# Altium PCB Player.PcbDoc (part 1 of 6)
Units mil, origin at the board's own origin, x right, y up, seen from the top; angles counter-clockwise.
Board outline 2992.13 x 3937.01 mil, 6 copper layers (Top Layer, Mid-Layer 1, Mid-Layer 2, Mid-Layer 3, Mid-Layer 4, Bottom Layer), stack 60.567 mil thick; 284 components, 323 nets, 1590 pads, 1045 vias.
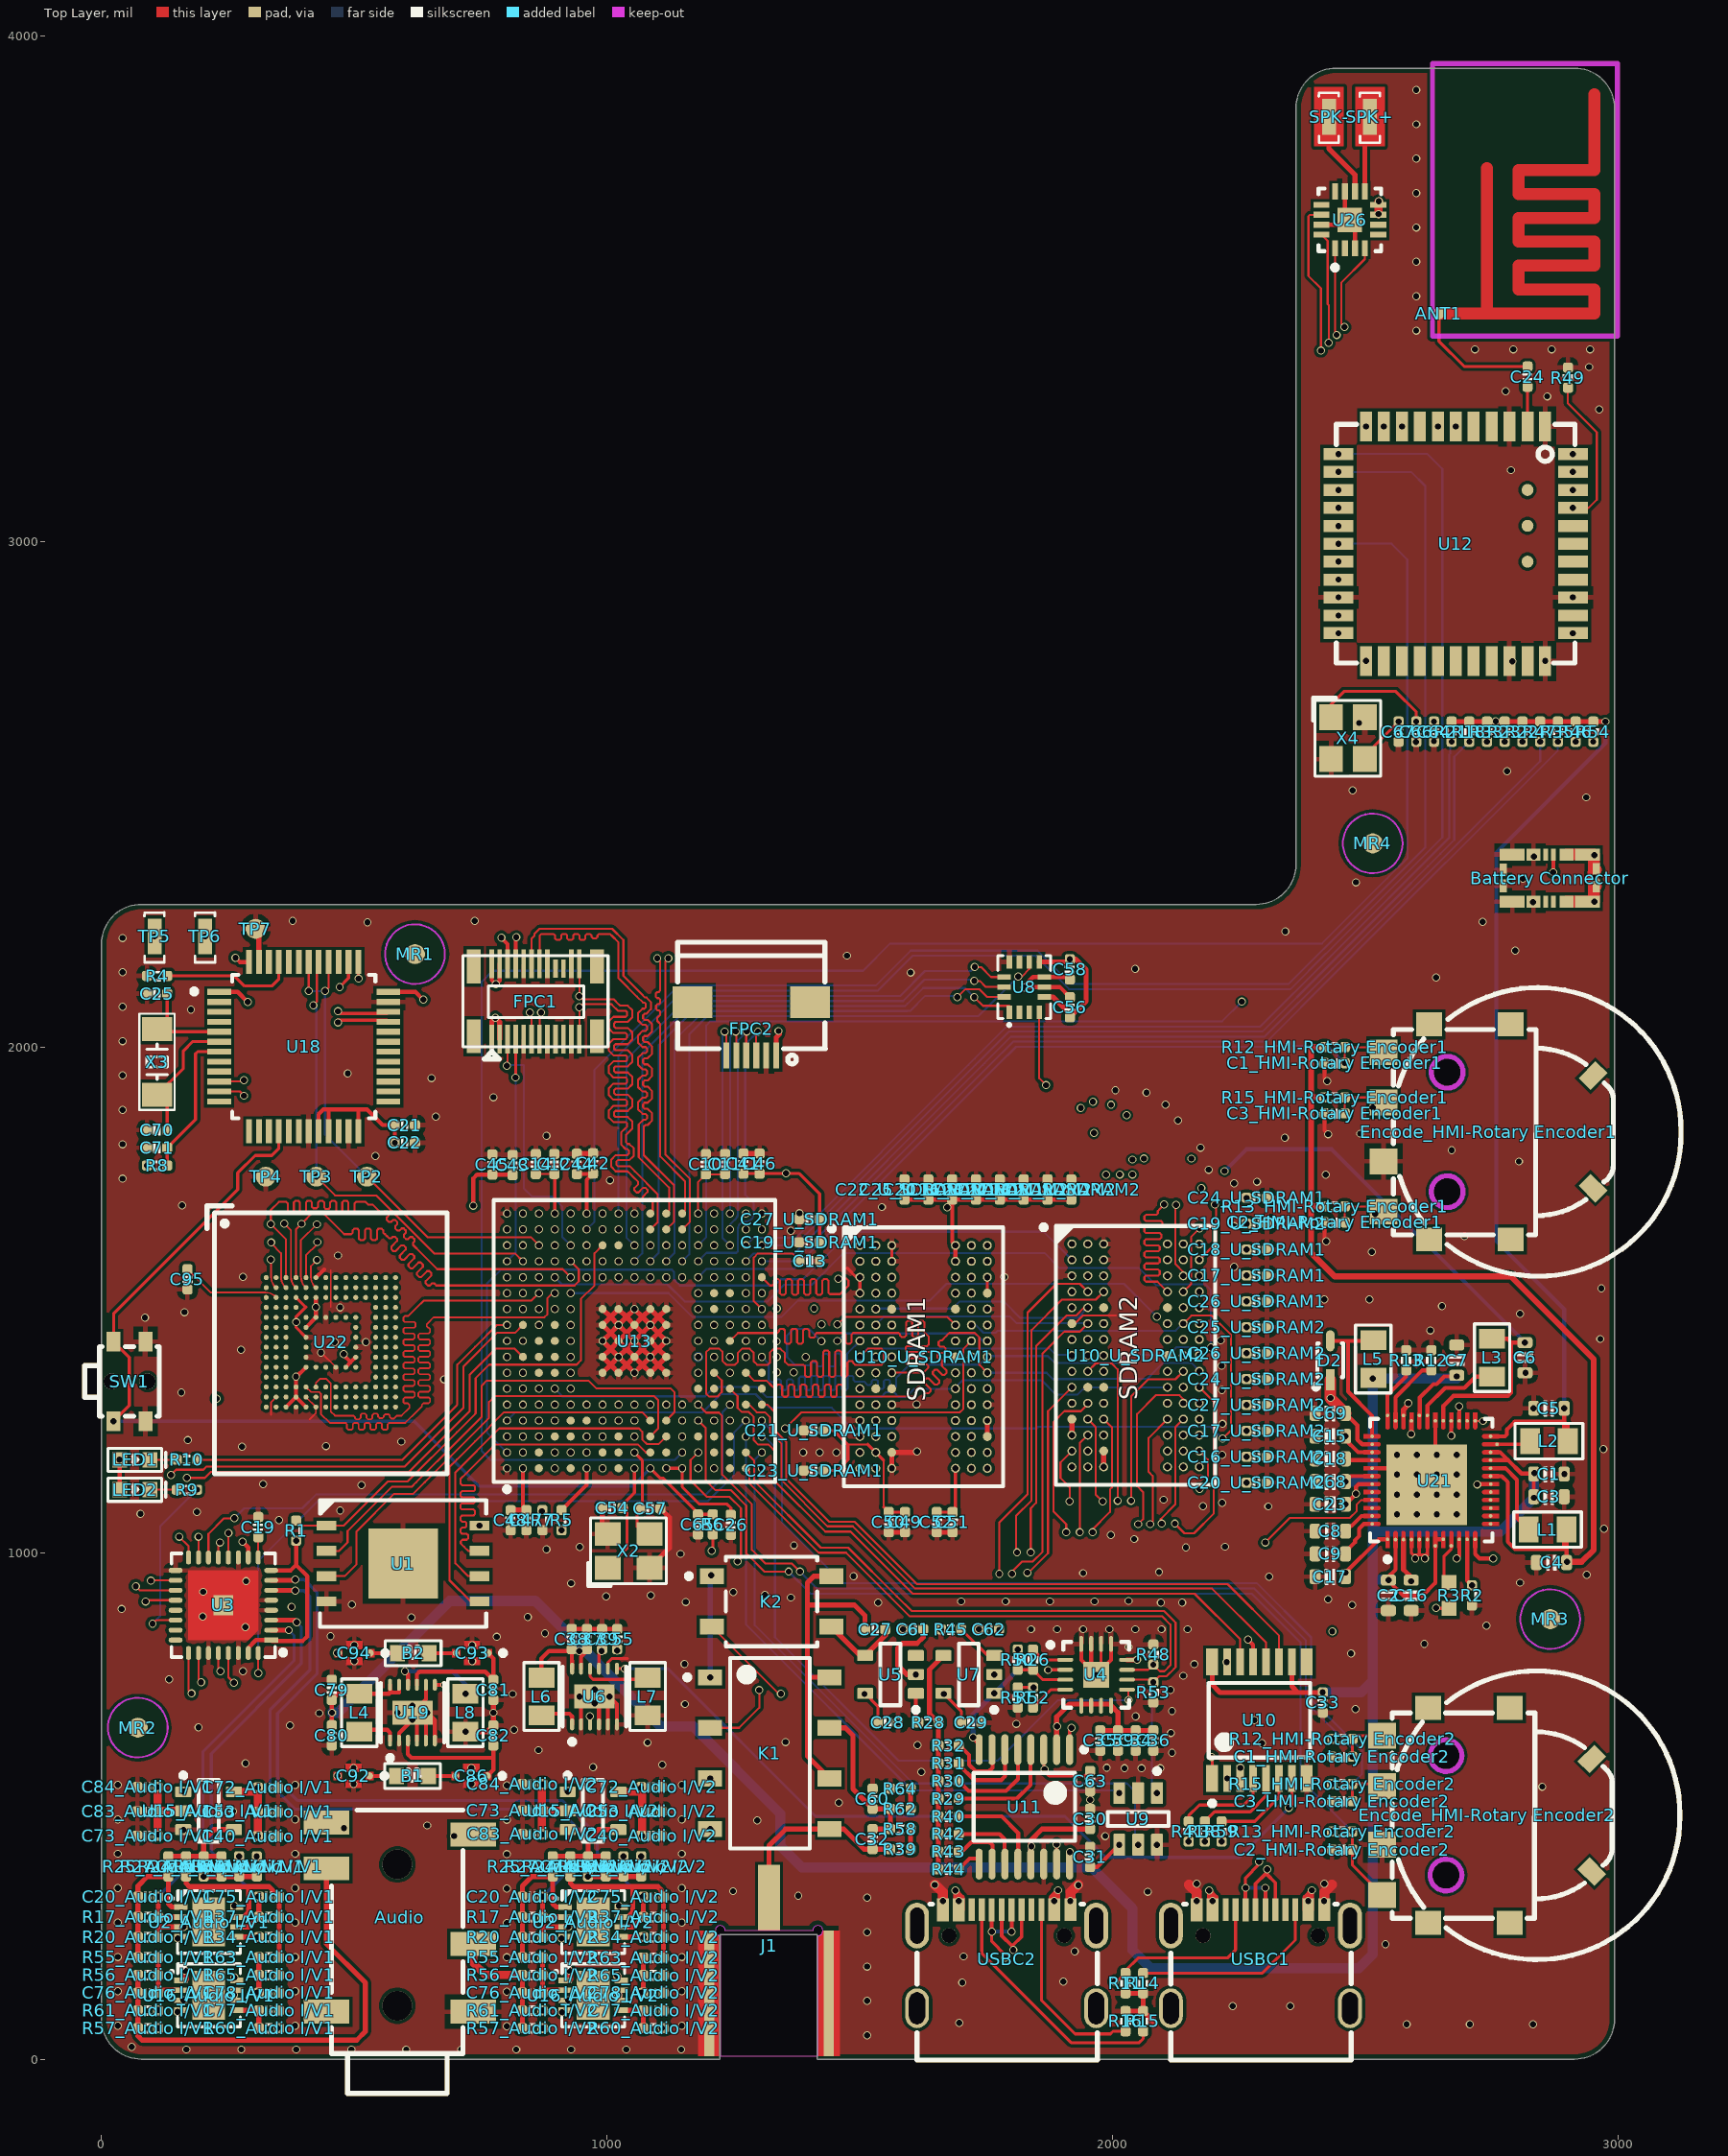
[diagram p0: Top Layer view]
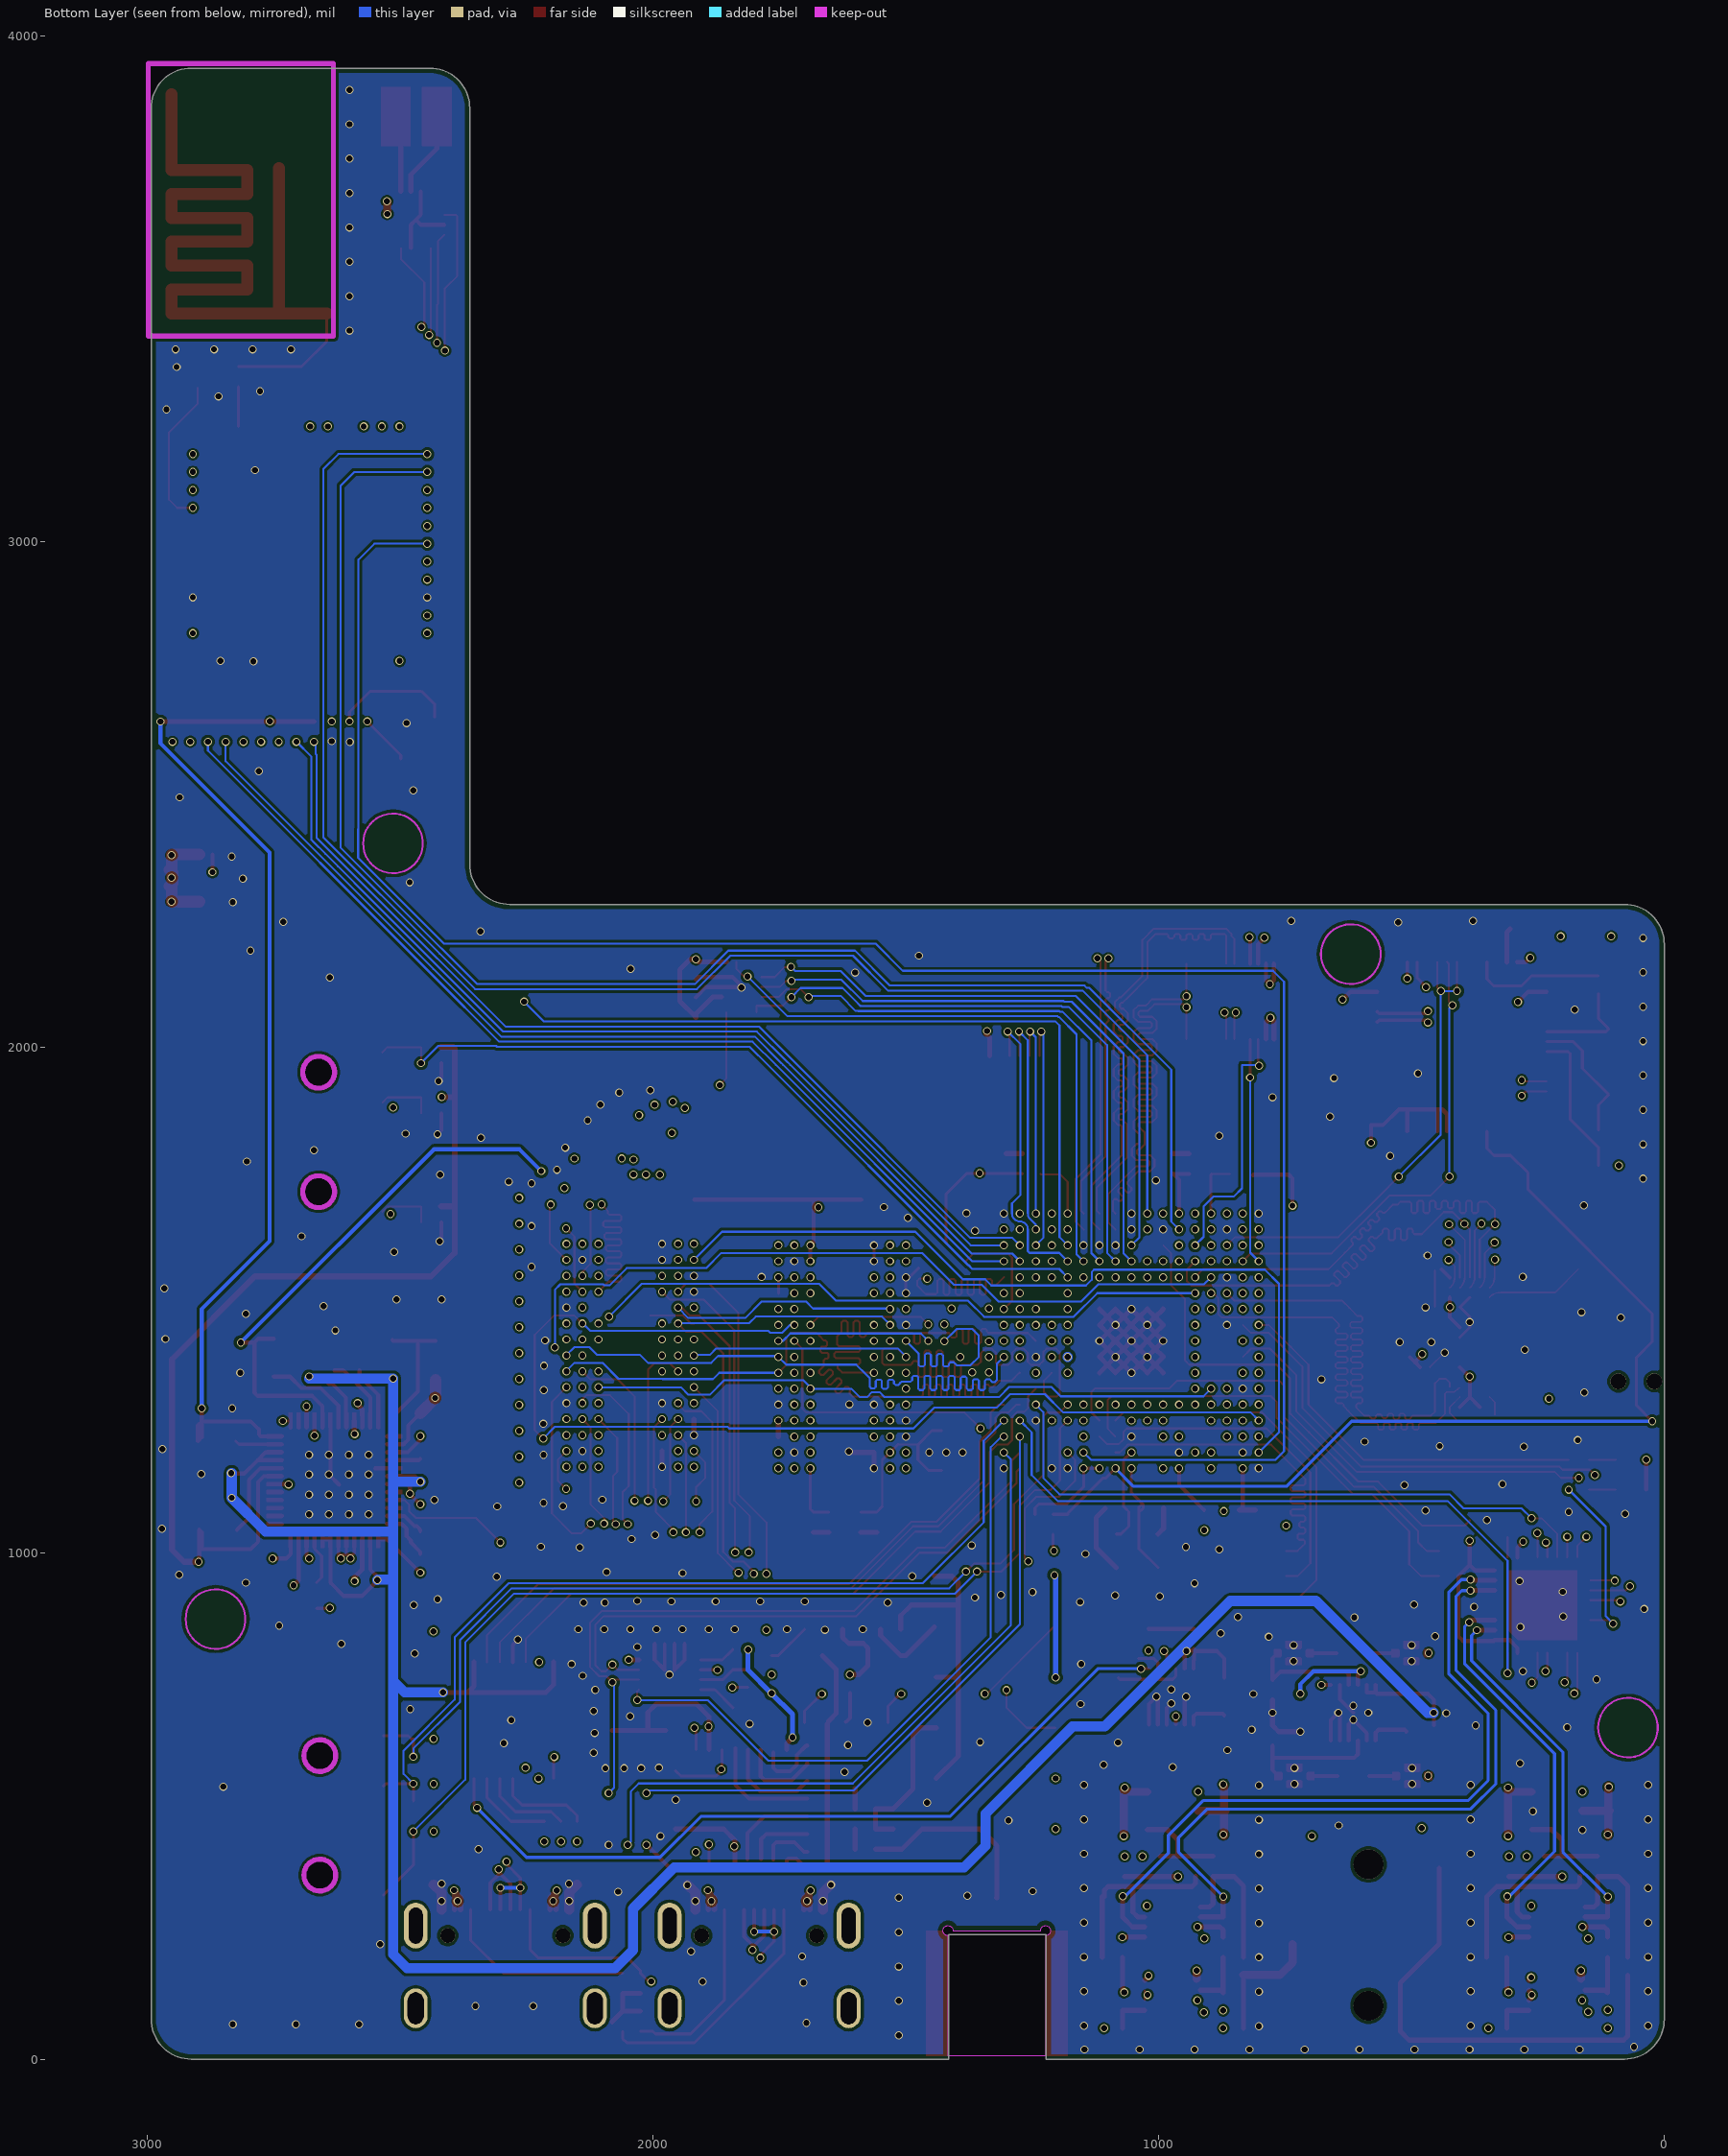
[diagram p1: Bottom Layer view, seen from below]
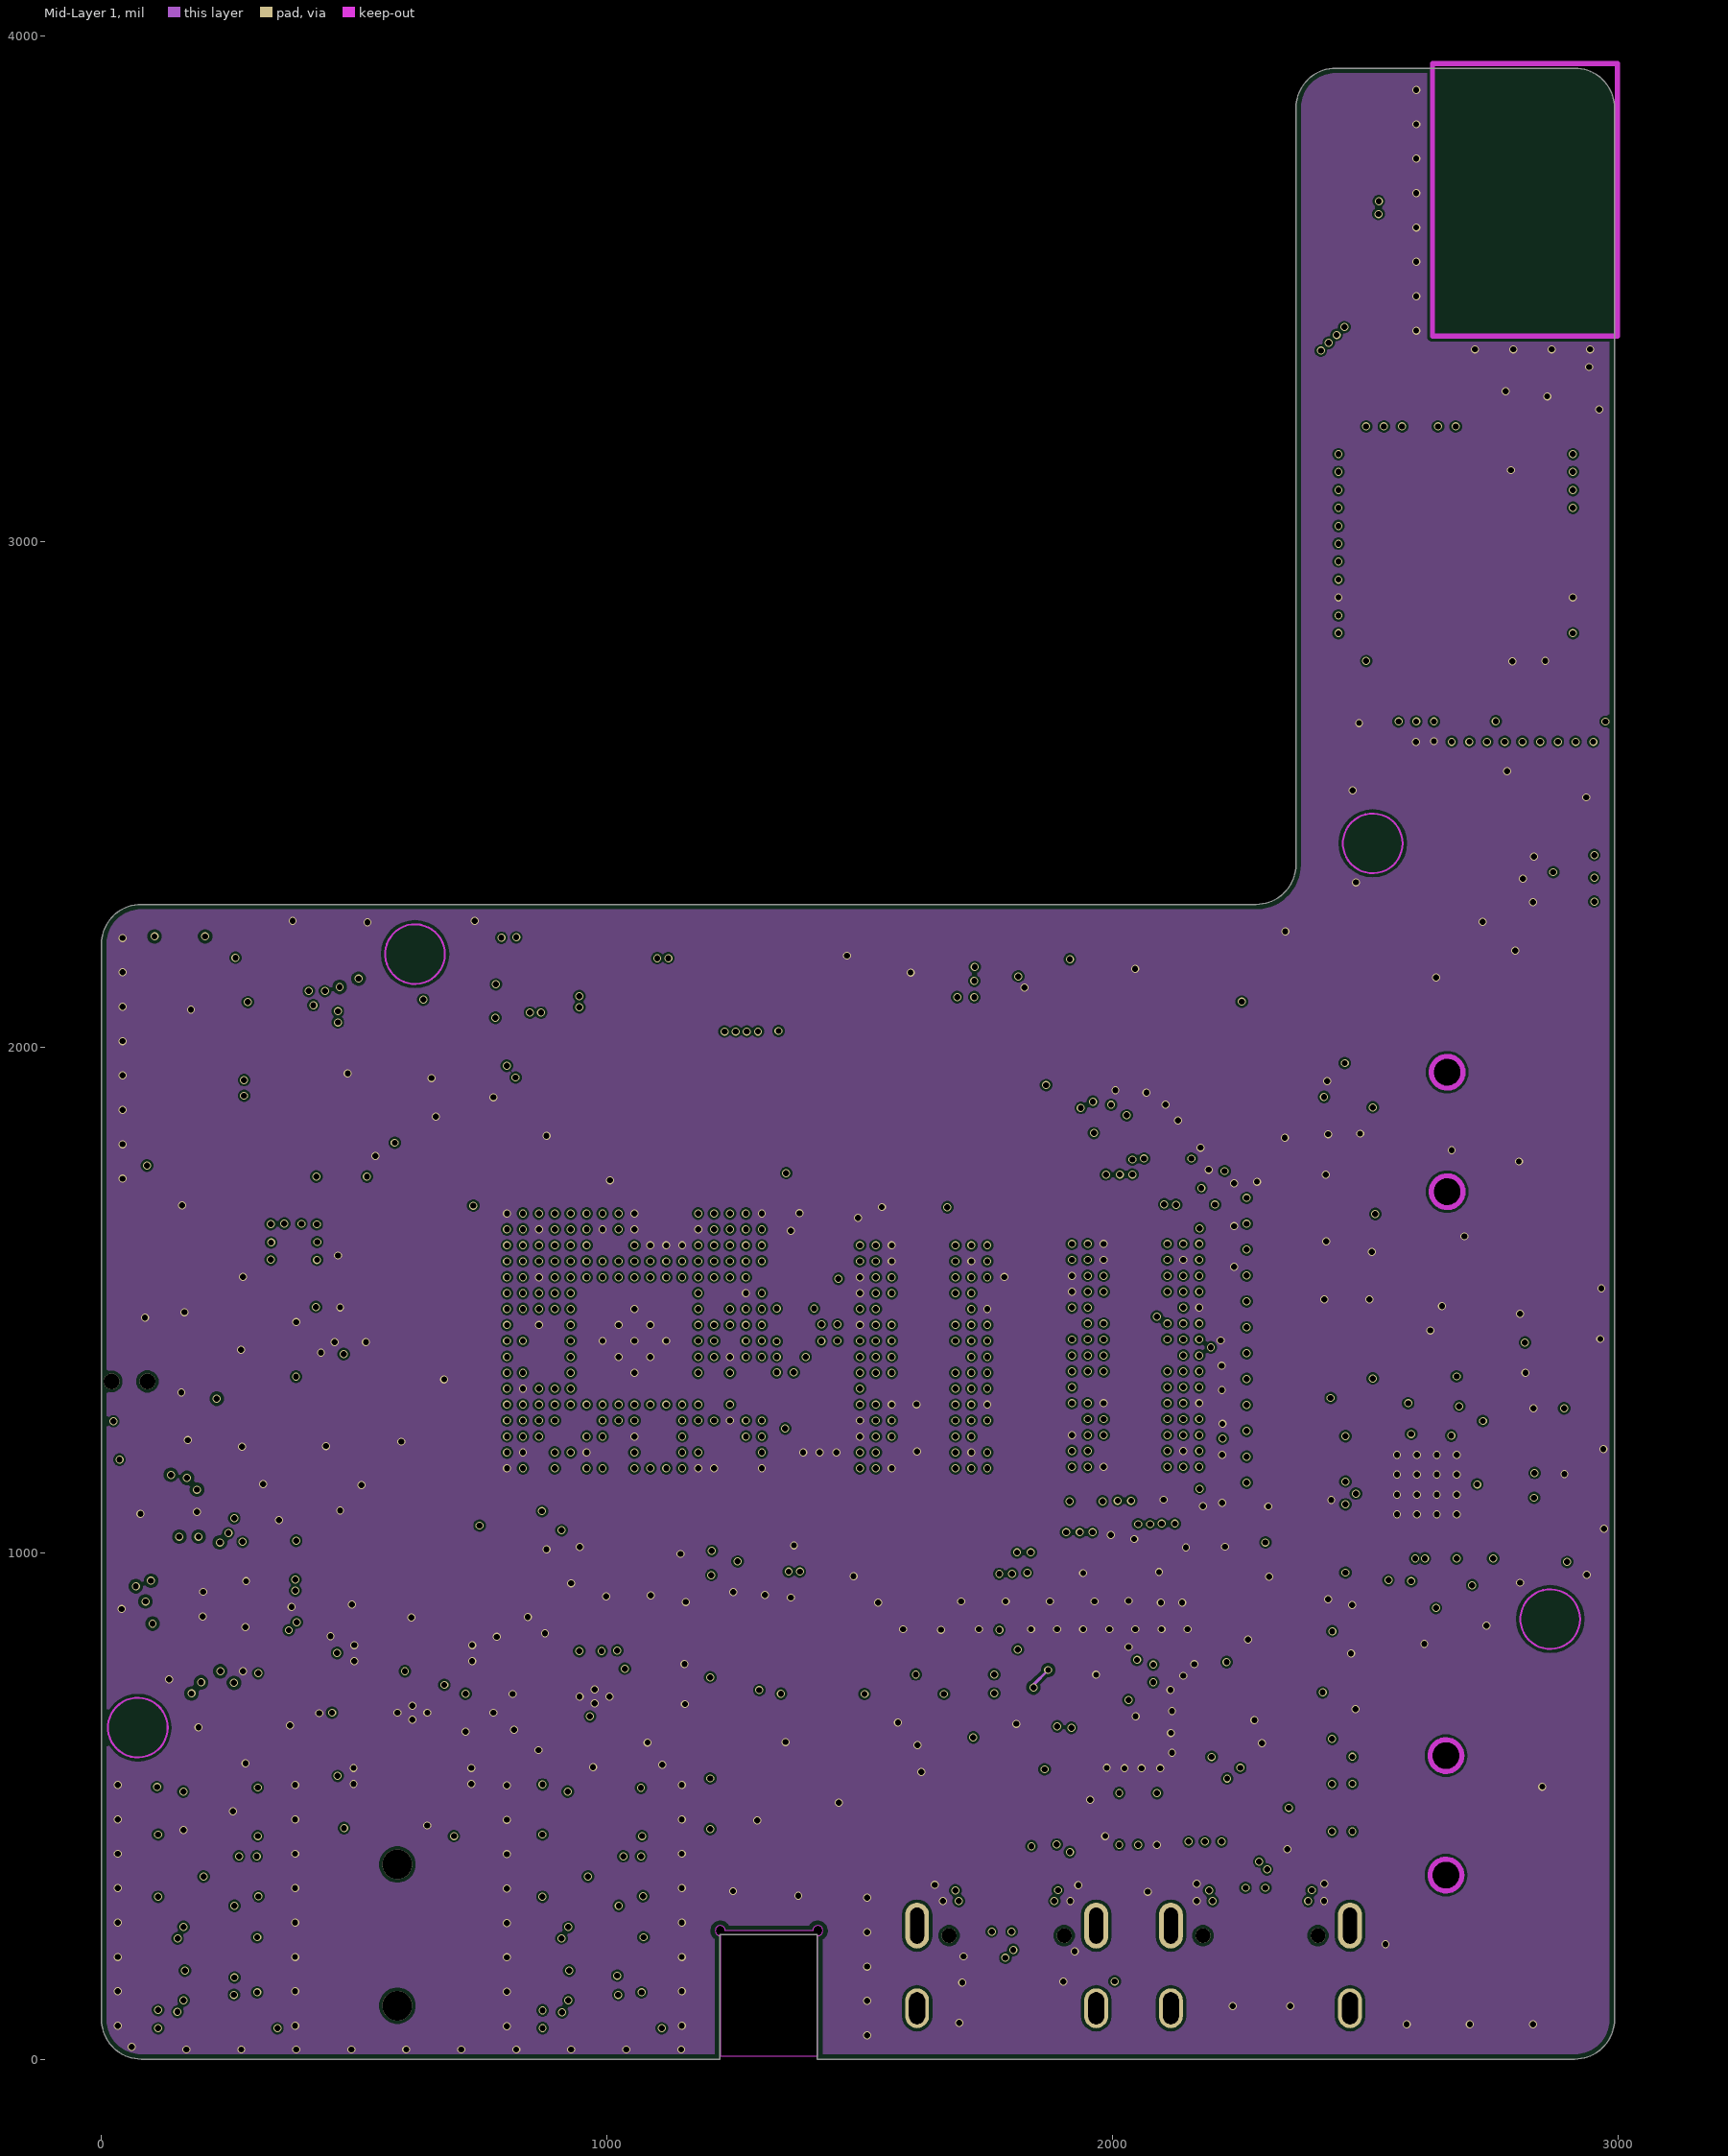
[diagram p2: Mid-Layer 1]
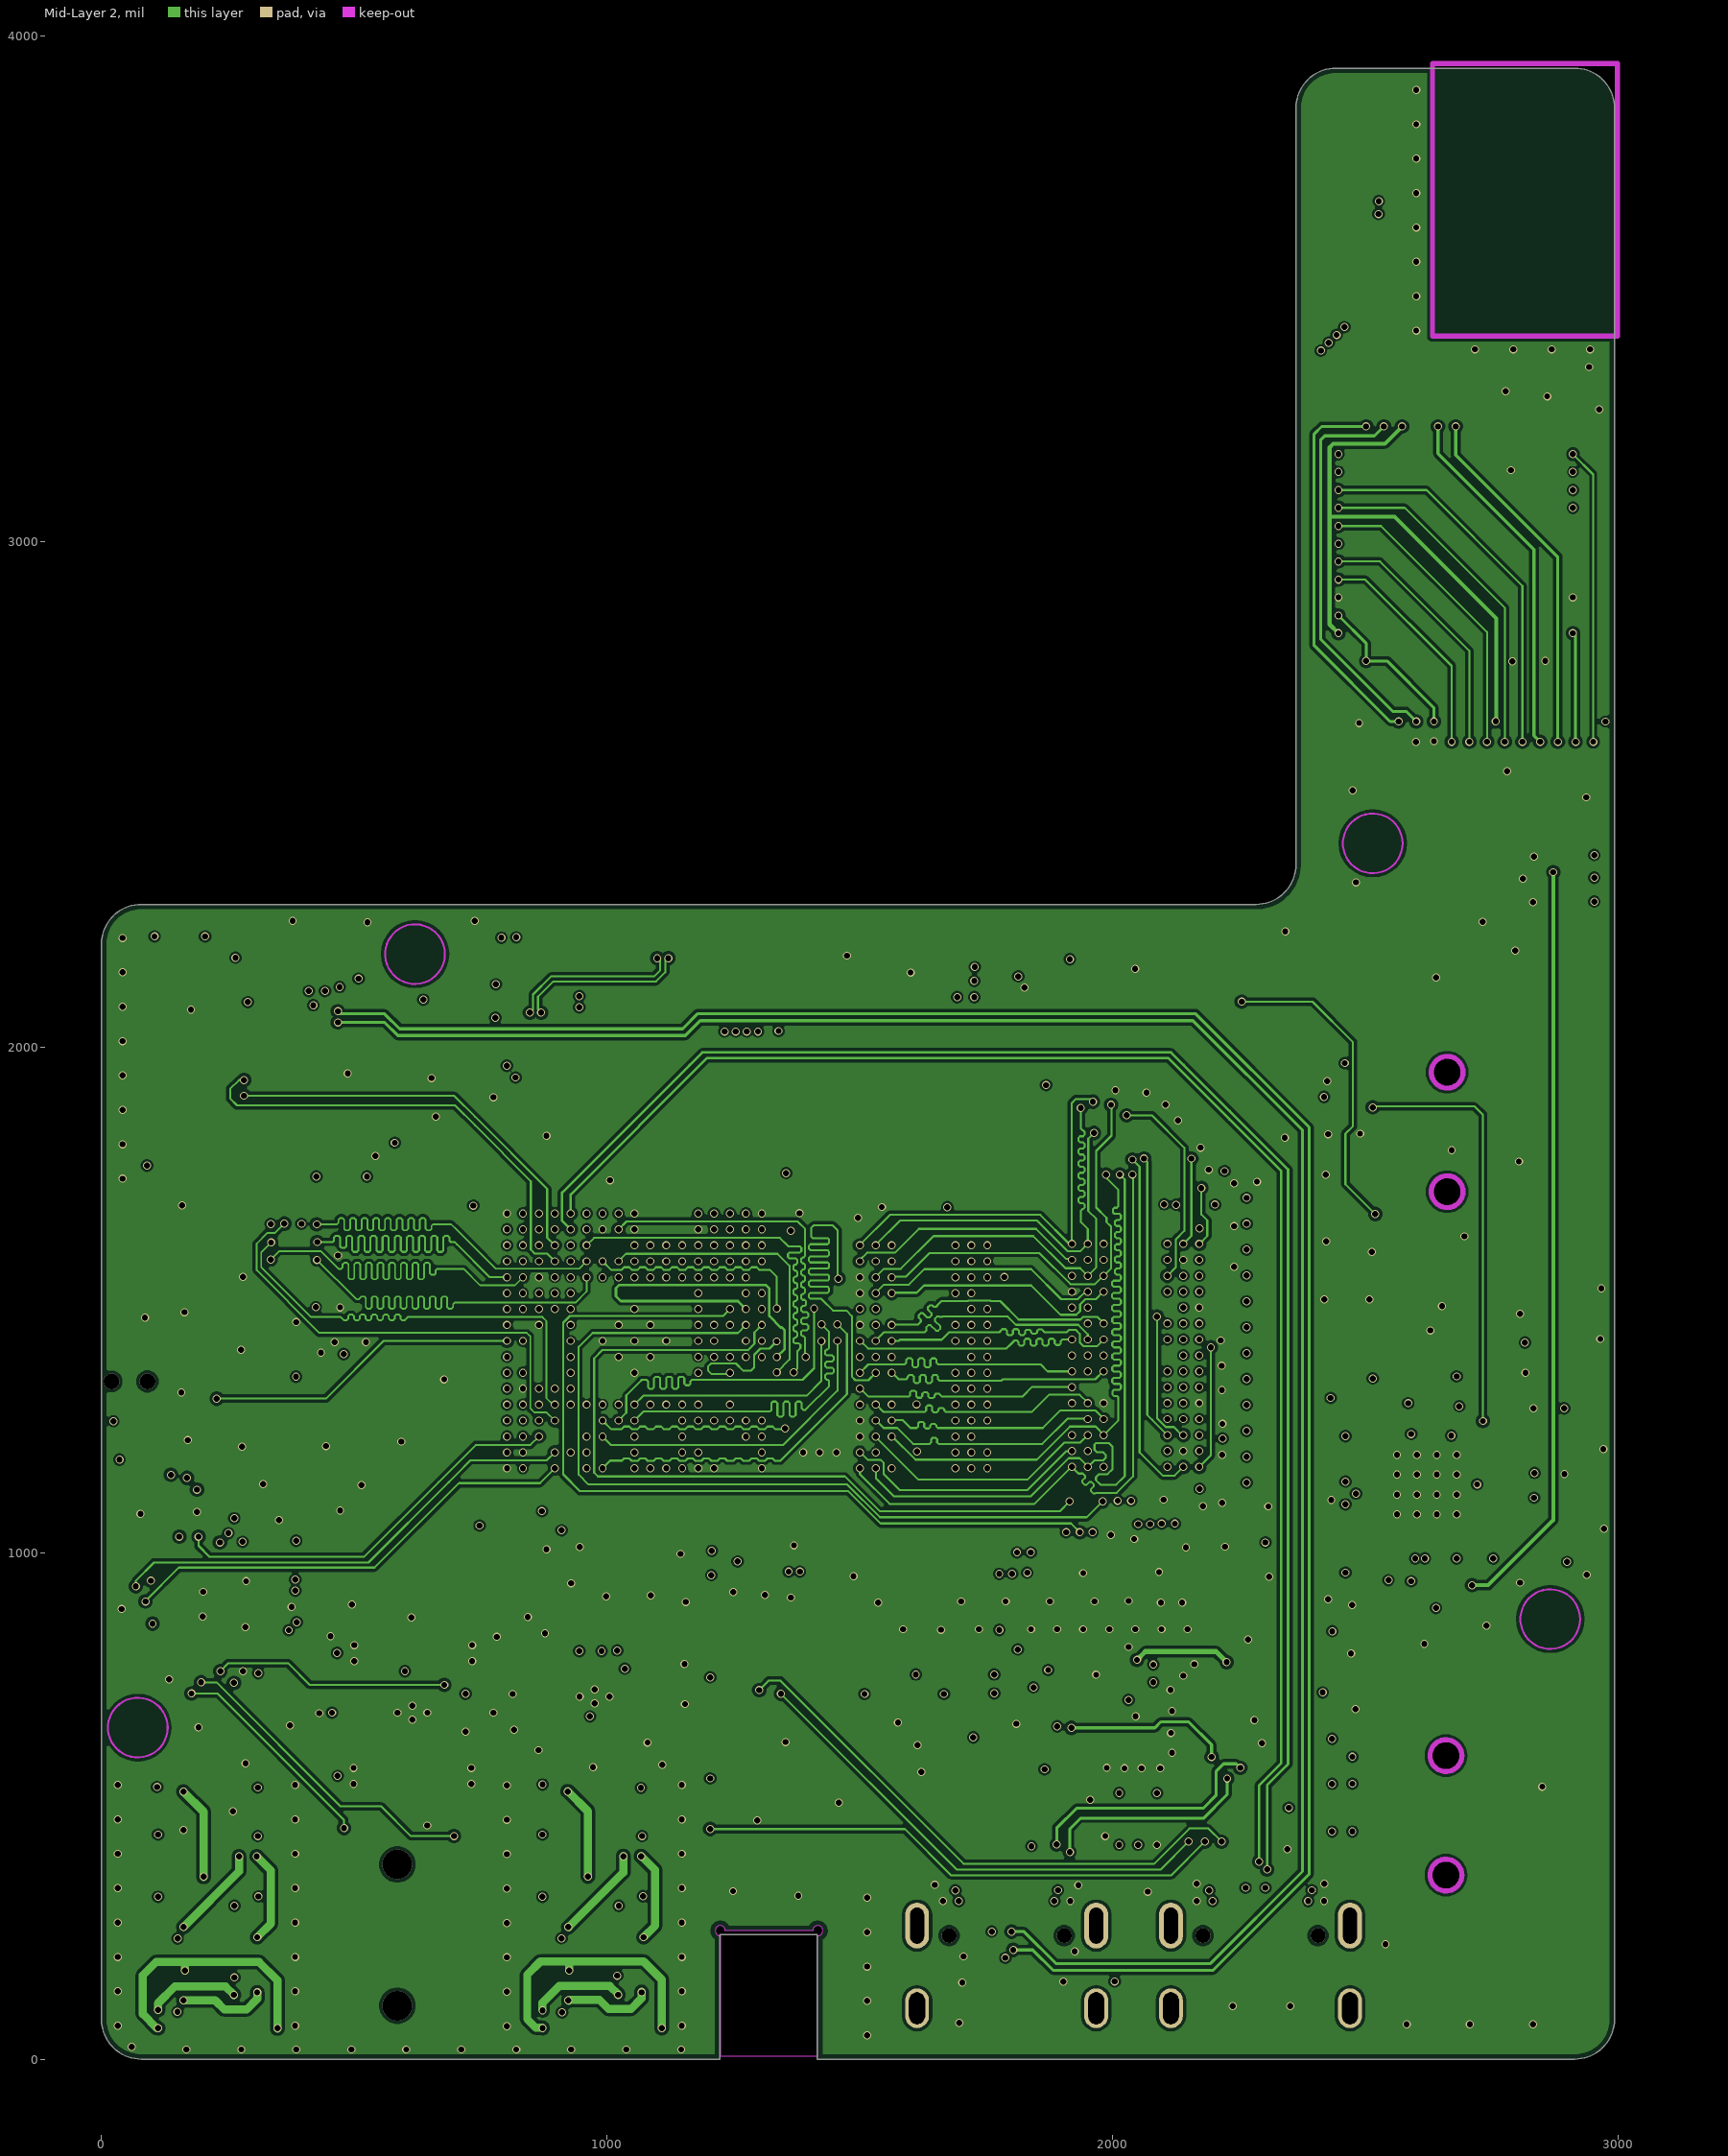
[diagram p3: Mid-Layer 2]
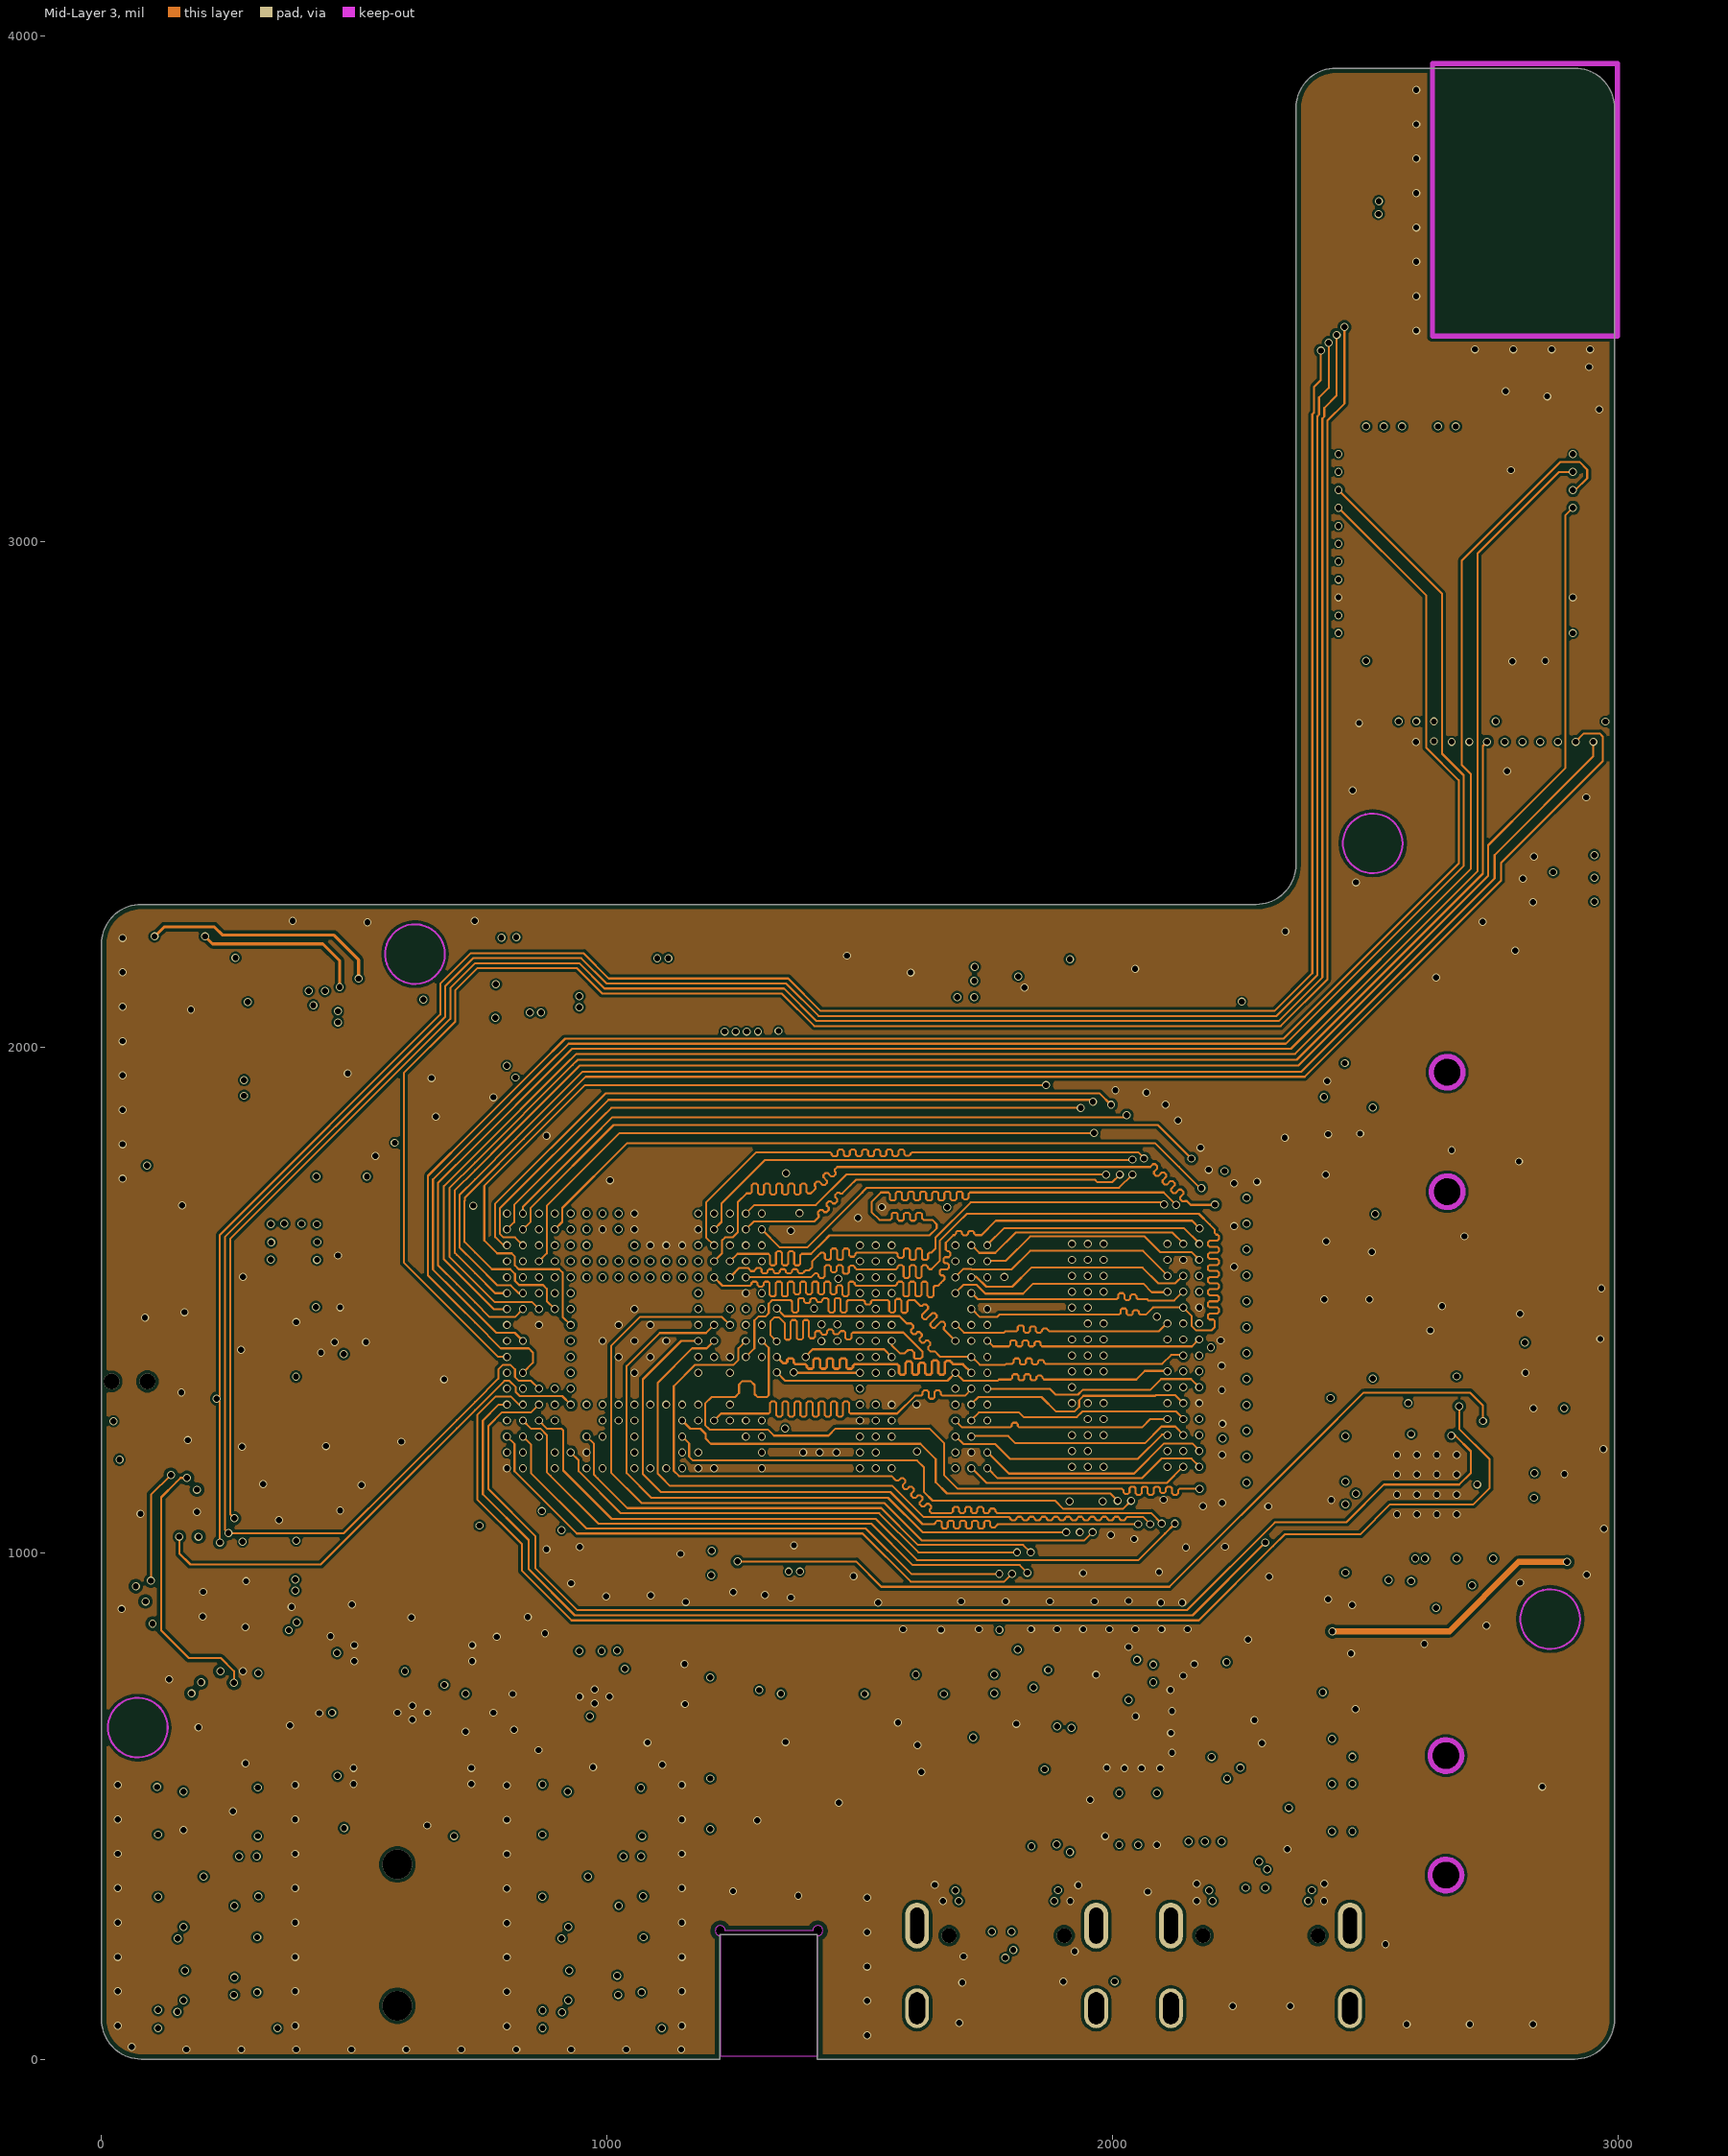
[diagram p4: Mid-Layer 3]
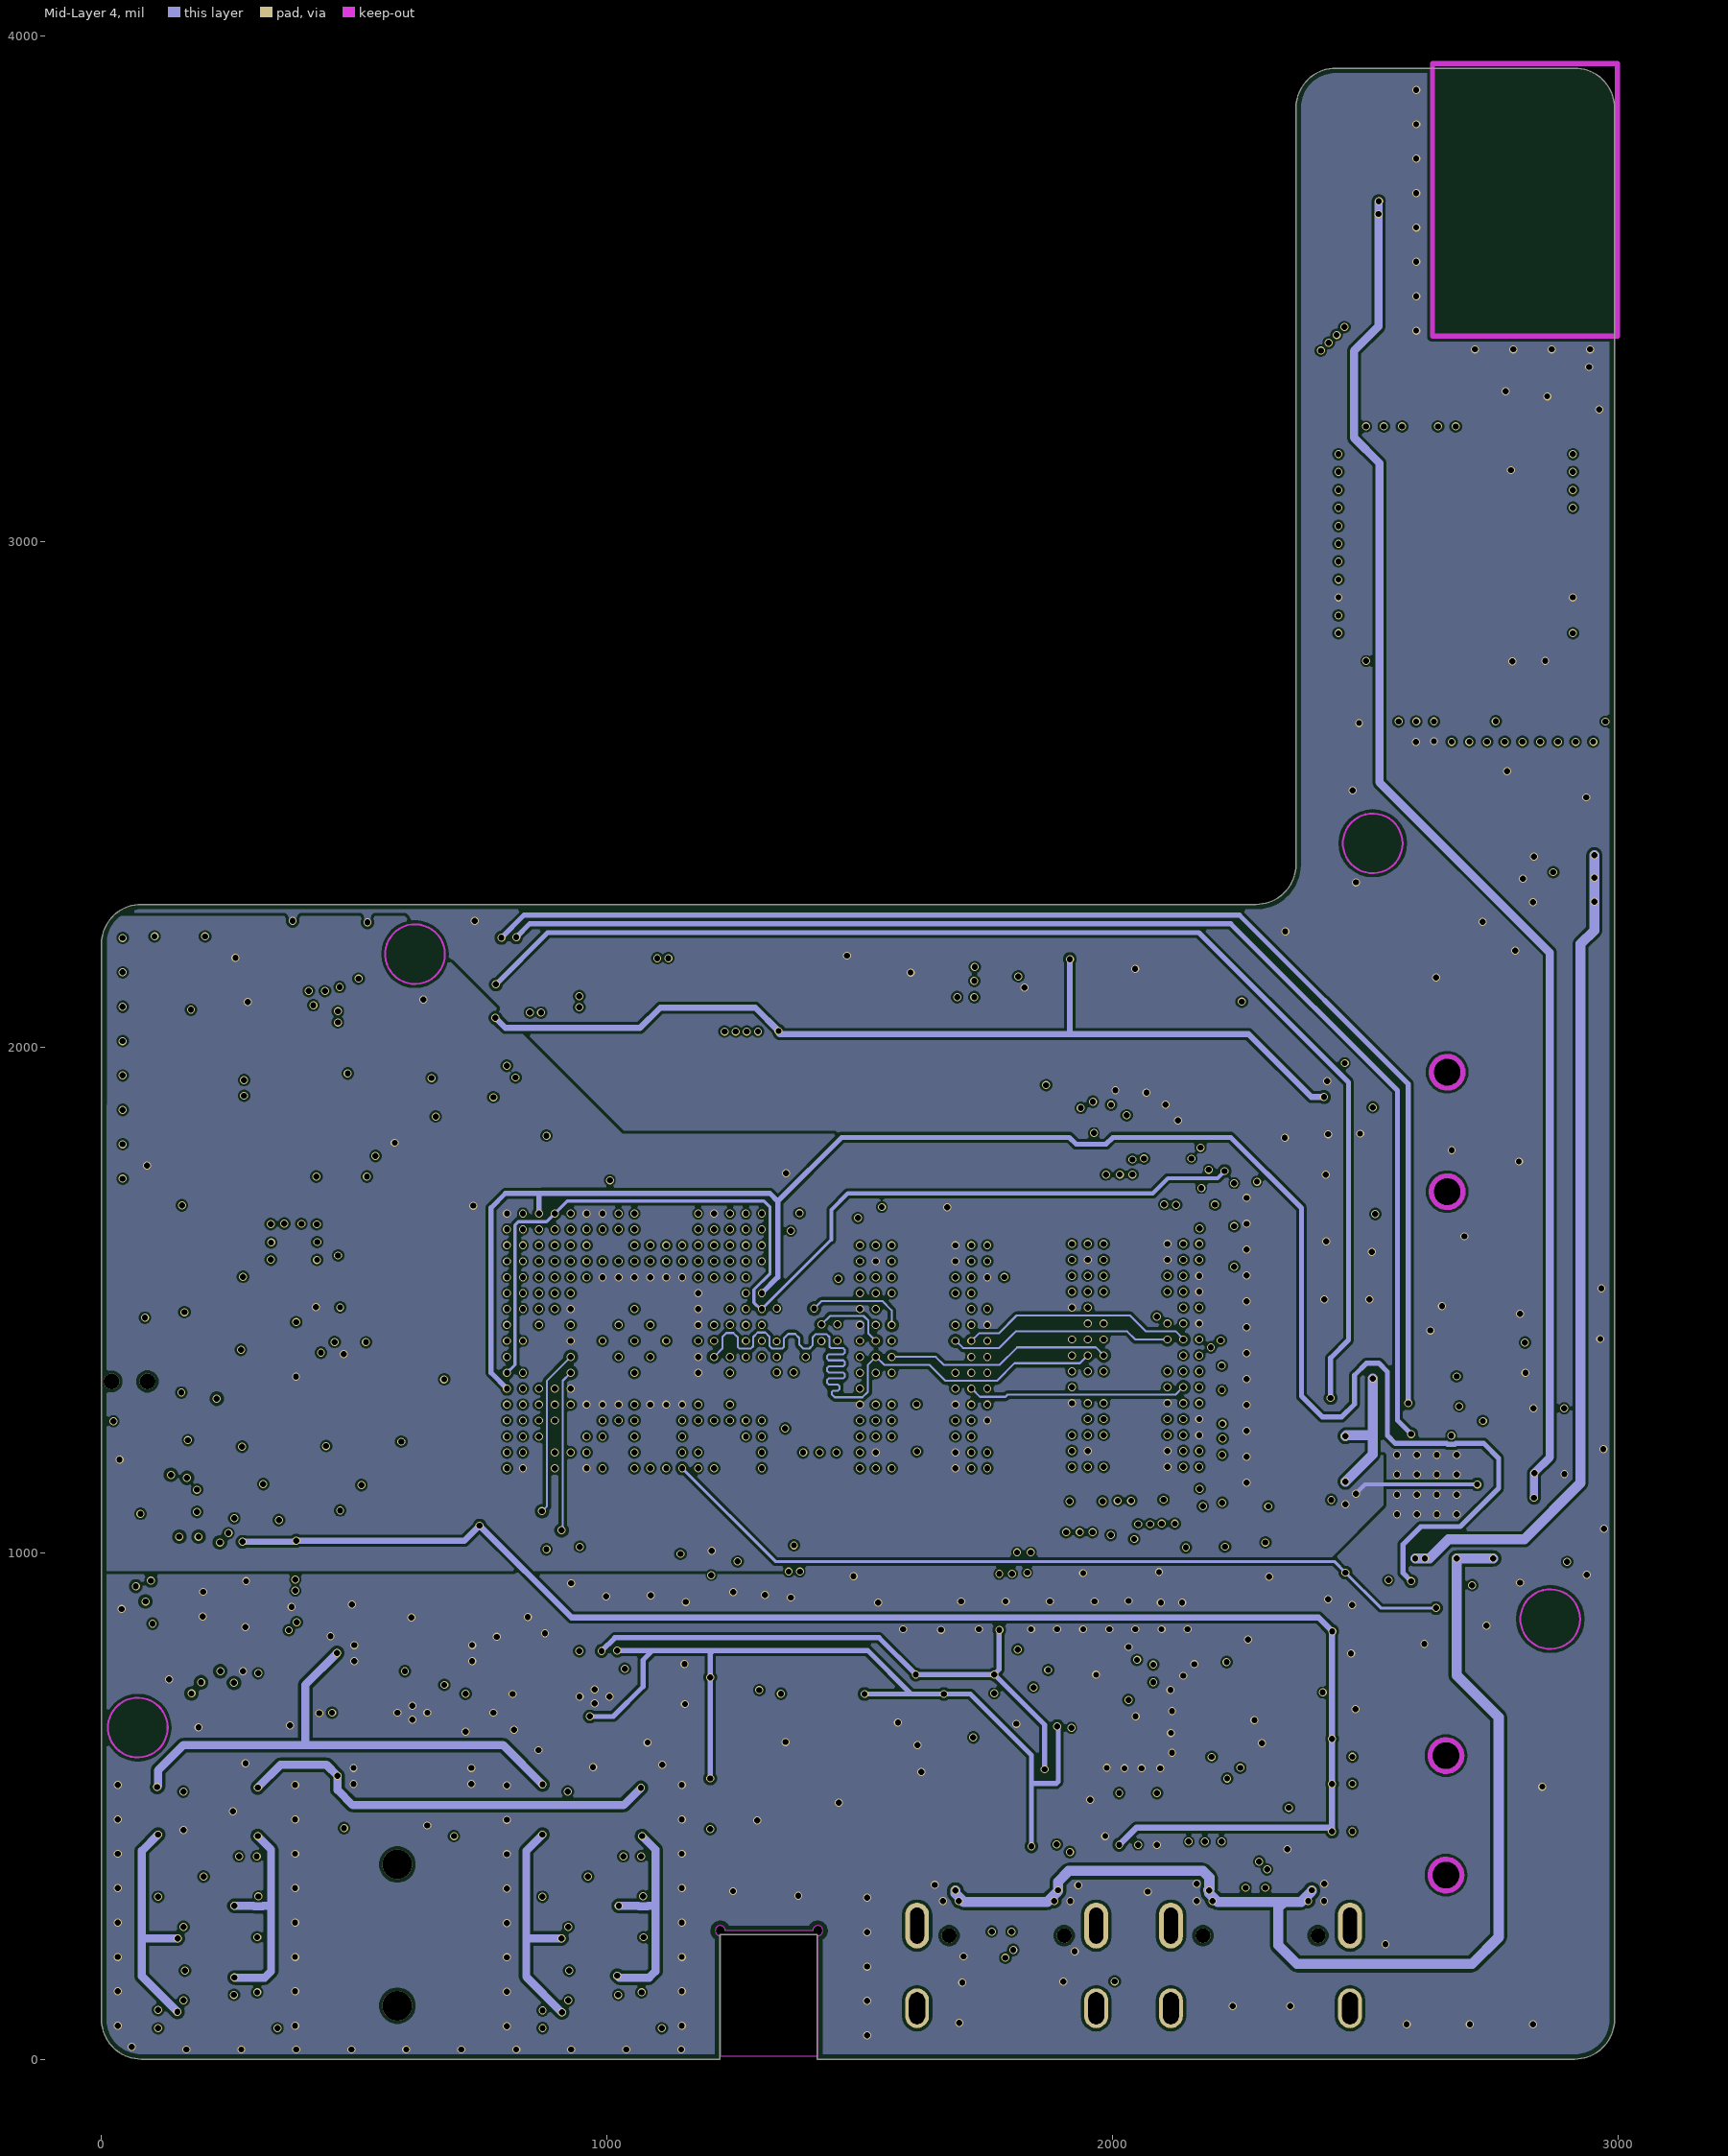
[diagram p5: Mid-Layer 4]
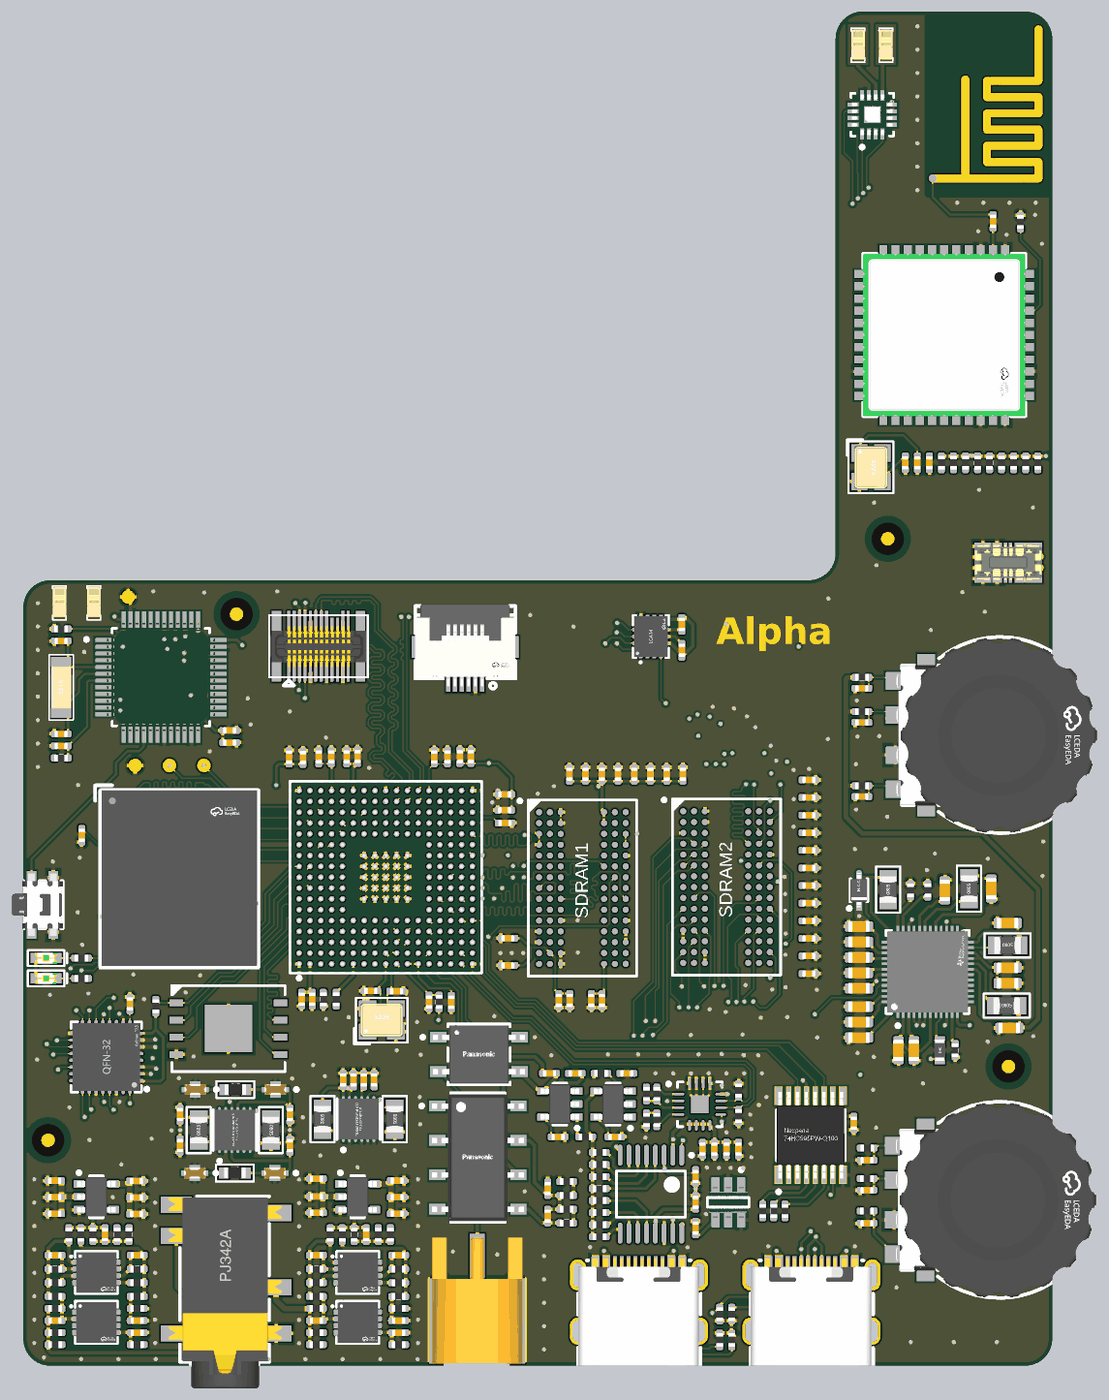
[diagram p11: 3D render of the assembled board from above, using the file's embedded part models]

## Layer stack, top to bottom
Top Solder: solder mask 0.4, Solder Resist, Dk 3.5
Top Layer: signal copper 1.378
Dielectric 1: dielectric 3.9134, FR-4, Dk 4.8
Mid-Layer 1: signal copper 0.5984
Dielectric5: dielectric 21.6535, FR-4, Dk 4.8
Mid-Layer 2: signal copper 0.5984
Dielectric3: dielectric 4.2835, FR-4, Dk 4.8
Mid-Layer 3: signal copper 0.5984
Dielectric4: dielectric 21.6535, FR-4, Dk 4.8
Mid-Layer 4: signal copper 0.5984
Dielectric2: dielectric 3.9134, FR-4, Dk 4.8
Bottom Layer: signal copper 1.378
Bottom Solder: solder mask 0.4, Solder Resist, Dk 3.5

## Board outline
78.74,0 1222.44,0 1222.44,246.12 1415,246.12 1415,0 2913.39,0 ccw(c2913.39,78.74) 2992.13,78.74 2992.13,3858.27 ccw(c2913.39,3858.27) 2913.39,3937.01 2440.94,3937.01 ccw(c2440.94,3858.27) 2362.2,3858.27 2362.2,2362.2 cw(c2283.46,2362.2) 2283.46,2283.46 78.74,2283.46 ccw(c78.74,2204.72) 0,2204.72 0,78.74 ccw(c78.74,78.74)

## Design rules (kind name [scope] priority, off if disabled: settings)
BoardOutlineClearance "lgnore object" [OnLayer('Top Overlay') or OnLayer('Bottom Overlay')] p1: gap=0 ignorepadtopadclearanceinfootprint=FALSE
BoardOutlineClearance [All] p2: gap=10 ignorepadtopadclearanceinfootprint=FALSE except(0: Arc-SplitContinuation Track-SplitContinuation SMDPad-SplitContinuation THPad-SplitContinuation Via-SplitContinuation Fill-SplitContinuation Poly-SplitContinuation Region-SplitContinuation Text-SplitContinuation)
Clearance "Stitching GND" [IsStitchingVia and InNet('GND') vs (IsVia and (not IsStitchingVia)) or IsPad] p1: gap=10 ignorepadtopadclearanceinfootprint=TRUE
Clearance Clearance_Polygon [All vs (InPolygon AND OnLayer('BOTTOM') OR OnLayer('TOP'))] p2: gap=11.81 ignorepadtopadclearanceinfootprint=TRUE
Clearance Clearance_EMMC [WithinRoom('U_EMMC')] p3: gap=6 ignorepadtopadclearanceinfootprint=TRUE except(3: Arc-SMDPad Track-SMDPad; 3.5: Arc-Arc Arc-Track Track-Track; 5: Arc-Via Track-Via)
Clearance Clearance_BL_BGA [WithinRoom('RoomBL')] p4: gap=6 ignorepadtopadclearanceinfootprint=TRUE except(3: Arc-SMDPad Track-SMDPad; 3.5: Arc-Arc Arc-Track Track-Track SMDPad-Via; 5: Arc-Via Track-Via)
Clearance Clearance_MCU [WithinRoom('MCU')] p5: gap=6 ignorepadtopadclearanceinfootprint=TRUE except(3.5: Arc-Arc Arc-Track Arc-Via Track-Track Track-Via; 4.4: Arc-SMDPad Track-SMDPad; 5: Arc-Hole Track-Hole SMDPad-Via)
Clearance [All] p6: gap=6 ignorepadtopadclearanceinfootprint=TRUE except(4.8: Arc-SMDPad Track-SMDPad; 5: Arc-Via Track-Via)
DiffPairsRouting "Schematic Differential Pairs Routing_4" [InNet('PA12')] p1: maxlimit=10 minlimit=4 mostfreqgap=6 toplayer_minwidth=4 toplayer_maxwidth=15 toplayer_prefwidth=6 midlayer1_minwidth=4 midlayer1_maxwidth=15 midlayer1_prefwidth=4 midlayer2_minwidth=4 midlayer2_maxwidth=15 midlayer2_prefwidth=4 midlayer3_minwidth=4 midlayer3_maxwidth=15 midlayer3_prefwidth=4 midlayer4_minwidth=4 midlayer4_maxwidth=15 midlayer4_prefwidth=4 bottomlayer_minwidth=4 bottomlayer_maxwidth=15 bottomlayer_prefwidth=6 maxuncoupledlength=100
DiffPairsRouting "Schematic Differential Pairs Routing_3" [InNet('PA11')] p2: maxlimit=10 minlimit=4 mostfreqgap=6 toplayer_minwidth=4 toplayer_maxwidth=15 toplayer_prefwidth=6 midlayer1_minwidth=4 midlayer1_maxwidth=15 midlayer1_prefwidth=4 midlayer2_minwidth=4 midlayer2_maxwidth=15 midlayer2_prefwidth=4 midlayer3_minwidth=4 midlayer3_maxwidth=15 midlayer3_prefwidth=4 midlayer4_minwidth=4 midlayer4_maxwidth=15 midlayer4_prefwidth=4 bottomlayer_minwidth=4 bottomlayer_maxwidth=15 bottomlayer_prefwidth=6 maxuncoupledlength=100
DiffPairsRouting "Schematic Differential Pairs Routing" [InDifferentialPairClass('USB')] p3: maxlimit=10 minlimit=4 mostfreqgap=6 toplayer_minwidth=4 toplayer_maxwidth=15 toplayer_prefwidth=6 midlayer1_minwidth=4 midlayer1_maxwidth=15 midlayer1_prefwidth=4 midlayer2_minwidth=4 midlayer2_maxwidth=15 midlayer2_prefwidth=4 midlayer3_minwidth=4 midlayer3_maxwidth=15 midlayer3_prefwidth=4 midlayer4_minwidth=4 midlayer4_maxwidth=15 midlayer4_prefwidth=4 bottomlayer_minwidth=4 bottomlayer_maxwidth=15 bottomlayer_prefwidth=6 maxuncoupledlength=100
DiffPairsRouting "Schematic Differential Pairs Routing_1" [InNetClass('ADC')] p4: maxlimit=10 minlimit=4 mostfreqgap=6 toplayer_minwidth=4 toplayer_maxwidth=15 toplayer_prefwidth=6 midlayer1_minwidth=4 midlayer1_maxwidth=15 midlayer1_prefwidth=4 midlayer2_minwidth=4 midlayer2_maxwidth=15 midlayer2_prefwidth=4 midlayer3_minwidth=4 midlayer3_maxwidth=15 midlayer3_prefwidth=4 midlayer4_minwidth=4 midlayer4_maxwidth=15 midlayer4_prefwidth=4 bottomlayer_minwidth=4 bottomlayer_maxwidth=15 bottomlayer_prefwidth=6 maxuncoupledlength=100
DiffPairsRouting "Schematic Differential Pairs Routing_6" [InNetClass('MIPI')] p5: maxlimit=10 minlimit=4 mostfreqgap=6 toplayer_minwidth=4 toplayer_maxwidth=15 toplayer_prefwidth=6 midlayer1_minwidth=4 midlayer1_maxwidth=15 midlayer1_prefwidth=4 midlayer2_minwidth=4 midlayer2_maxwidth=15 midlayer2_prefwidth=4 midlayer3_minwidth=4 midlayer3_maxwidth=15 midlayer3_prefwidth=4 midlayer4_minwidth=4 midlayer4_maxwidth=15 midlayer4_prefwidth=4 bottomlayer_minwidth=4 bottomlayer_maxwidth=15 bottomlayer_prefwidth=6 maxuncoupledlength=100
DiffPairsRouting [All] p6: maxlimit=10 minlimit=3.5 mostfreqgap=4 toplayer_minwidth=3 toplayer_maxwidth=15 toplayer_prefwidth=4 midlayer1_minwidth=3 midlayer1_maxwidth=15 midlayer1_prefwidth=4 midlayer2_minwidth=3 midlayer2_maxwidth=15 midlayer2_prefwidth=4 midlayer3_minwidth=3 midlayer3_maxwidth=15 midlayer3_prefwidth=4 midlayer4_minwidth=3 midlayer4_maxwidth=15 midlayer4_prefwidth=4 bottomlayer_minwidth=3 bottomlayer_maxwidth=15 bottomlayer_prefwidth=4 maxuncoupledlength=500
FanoutControl [InComponent('U10_U_SDRAM1','U10_U_SDRAM2')] p1: bgadir=Out bgaviamode=Centered fanoutstyle=BGA fanoutdirection=Alternating viagrid=1
FanoutControl Fanout_BGA [IsBGA] p2: bgadir=Out bgaviamode=Centered fanoutstyle=Auto fanoutdirection=Alternating viagrid=1 // Fanout_BGA (Default Rule)
FanoutControl Fanout_LCC [IsLCC] p3: bgadir=Out bgaviamode=Centered fanoutstyle=Auto fanoutdirection=Alternating viagrid=1 // Fanout_LCC (Default Rule)
FanoutControl Fanout_SOIC [IsSOIC] p4: bgadir=Out bgaviamode=Centered fanoutstyle=Auto fanoutdirection=Alternating viagrid=1 // Fanout_SOIC (Default Rule)
FanoutControl Fanout_Small [(CompPinCount < 5)] p5: bgadir=Out bgaviamode=Centered fanoutstyle=Auto fanoutdirection=OutThenIn viagrid=1 // Fanout_Small (Default Rule)
FanoutControl Fanout_Default [All] p6: bgadir=Out bgaviamode=Centered fanoutstyle=Auto fanoutdirection=Alternating viagrid=1 // Fanout_Default (Default Rule)
MatchedLengths "Schematic Matched Net Lengths" [InNetClass('QSPI')] p1: tolerance=100 checknetsindiffpair=FALSE checkdiffpairvsdiffpair=TRUE checkxsignals=TRUE checkothers=TRUE
MatchedLengths "Schematic Matched Net Lengths_4" [InNetClass('SDMMC')] p2: tolerance=100 checknetsindiffpair=FALSE checkdiffpairvsdiffpair=TRUE checkxsignals=TRUE checkothers=TRUE
MatchedLengths "Schematic Matched Net Lengths_2" [InNetClass('ADC')] p3: tolerance=50 checknetsindiffpair=FALSE checkdiffpairvsdiffpair=TRUE checkxsignals=TRUE checkothers=TRUE
MatchedLengths "Schematic Matched Net Lengths_3" [InNetClass('MIPI')] p4: tolerance=50 checknetsindiffpair=FALSE checkdiffpairvsdiffpair=TRUE checkxsignals=TRUE checkothers=TRUE
MatchedLengths MatchLengths_xSignals_U22_U13 [InxSignalClass('xSignals_U22_U13_MatchLengthsClass')] p5: tolerance=20 checknetsindiffpair=FALSE checkdiffpairvsdiffpair=TRUE checkxsignals=TRUE checkothers=TRUE
MatchedLengths MatchLengths_xSignals_U13_FPC1 [InxSignalClass('xSignals_U13_FPC1_MatchLengthsClass')] p6: tolerance=20 checknetsindiffpair=TRUE checkdiffpairvsdiffpair=FALSE checkxsignals=FALSE checkothers=FALSE
MatchedLengths MatchLengths_xSignals_U10_U_SDRAM1_U10_U_SDRAM2_Addr_CMD [InxSignalClass('xSignals_U10_U_SDRAM1_U10_U_SDRAM2_MatchLengthsClass_Addr_CMD')] p7: tolerance=50 checknetsindiffpair=FALSE checkdiffpairvsdiffpair=TRUE checkxsignals=TRUE checkothers=TRUE
MatchedLengths MatchLengths_xSignals_U10_U_SDRAM1_U10_U_SDRAM2_Data3 [InxSignalClass('xSignals_U10_U_SDRAM1_U10_U_SDRAM2_MatchLengthsClass_Data3')] p8: tolerance=50 checknetsindiffpair=FALSE checkdiffpairvsdiffpair=TRUE checkxsignals=TRUE checkothers=TRUE
MatchedLengths MatchLengths_xSignals_U10_U_SDRAM1_U10_U_SDRAM2_Data2 [InxSignalClass('xSignals_U10_U_SDRAM1_U10_U_SDRAM2_MatchLengthsClass_Data2')] p9: tolerance=50 checknetsindiffpair=FALSE checkdiffpairvsdiffpair=TRUE checkxsignals=TRUE checkothers=TRUE
MatchedLengths ADDR_CMD [InxSignalClass('xSignals_ADDR_CMD')] p10: tolerance=100 checknetsindiffpair=FALSE checkdiffpairvsdiffpair=TRUE checkxsignals=TRUE checkothers=TRUE
MatchedLengths MatchLengths_xSignals_U10_U_SDRAM1_U10_U_SDRAM2_Data0 [InxSignalClass('xSignals_U10_U_SDRAM1_U10_U_SDRAM2_MatchLengthsClass_Data0')] p11: tolerance=50 checknetsindiffpair=FALSE checkdiffpairvsdiffpair=TRUE checkxsignals=TRUE checkothers=TRUE
MatchedLengths MatchLengths_xSignals_U10_U_SDRAM1_U10_U_SDRAM2_Data1 [InxSignalClass('xSignals_U10_U_SDRAM1_U10_U_SDRAM2_MatchLengthsClass_Data1')] p12: tolerance=50 checknetsindiffpair=FALSE checkdiffpairvsdiffpair=TRUE checkxsignals=TRUE checkothers=TRUE
MatchedLengths SDRAM_Data0 [InxSignalClass('xSignals_Data0')] p13: tolerance=100 checknetsindiffpair=FALSE checkdiffpairvsdiffpair=TRUE checkxsignals=TRUE checkothers=TRUE
MatchedLengths SDRAM_Data1 [InxSignalClass('xSignals_Data1')] p14: tolerance=100 checknetsindiffpair=FALSE checkdiffpairvsdiffpair=TRUE checkxsignals=TRUE checkothers=TRUE
MatchedLengths SDRAM_Data2 [InxSignalClass('xSignals_Data2')] p15: tolerance=100 checknetsindiffpair=FALSE checkdiffpairvsdiffpair=TRUE checkxsignals=TRUE checkothers=TRUE
MatchedLengths SDRAM_Data3 [InxSignalClass('xSignals_Data3')] p16: tolerance=100 checknetsindiffpair=FALSE checkdiffpairvsdiffpair=TRUE checkxsignals=TRUE checkothers=TRUE
MatchedLengths MatchLengths_xSignals_U13_U10_U_SDRAM1,U10_U_SDRAM2_5 [InxSignalClass('xSignals_U13_U10_U_SDRAM1,U10_U_SDRAM2_MatchLengthsClass_4')] p17 off: tolerance=100 checknetsindiffpair=FALSE checkdiffpairvsdiffpair=TRUE checkxsignals=TRUE checkothers=TRUE
MatchedLengths MatchLengths_xSignals_U13_U10_U_SDRAM1,U10_U_SDRAM2_4 [InxSignalClass('xSignals_U13_U10_U_SDRAM1,U10_U_SDRAM2_MatchLengthsClass_3')] p18 off: tolerance=100 checknetsindiffpair=FALSE checkdiffpairvsdiffpair=TRUE checkxsignals=TRUE checkothers=TRUE
MatchedLengths MatchLengths_xSignals_U13_U10_U_SDRAM1,U10_U_SDRAM2_3 [InxSignalClass('xSignals_U13_U10_U_SDRAM1,U10_U_SDRAM2_MatchLengthsClass_2')] p19 off: tolerance=100 checknetsindiffpair=FALSE checkdiffpairvsdiffpair=TRUE checkxsignals=TRUE checkothers=TRUE
MatchedLengths MatchLengths_xSignals_U13_U10_U_SDRAM1,U10_U_SDRAM2_2 [InxSignalClass('xSignals_U13_U10_U_SDRAM1,U10_U_SDRAM2_MatchLengthsClass_1')] p20 off: tolerance=100 checknetsindiffpair=FALSE checkdiffpairvsdiffpair=TRUE checkxsignals=TRUE checkothers=TRUE
MatchedLengths MatchLengths_xSignals_U13_U10_U_SDRAM1,U10_U_SDRAM2_1 [InxSignalClass('xSignals_U13_U10_U_SDRAM1,U10_U_SDRAM2_MatchLengthsClass')] p21 off: tolerance=100 checknetsindiffpair=FALSE checkdiffpairvsdiffpair=TRUE checkxsignals=TRUE checkothers=TRUE
MatchedLengths MatchLengths_xSignals_U13_U10_U_SDRAM1,U10_U_SDRAM2 [InxSignalClass('xSignals_U13_U10_U_SDRAM1,U10_U_SDRAM2')] p22 off: tolerance=100 checknetsindiffpair=FALSE checkdiffpairvsdiffpair=TRUE checkxsignals=TRUE checkothers=TRUE
MinimumSolderMaskSliver [All] p1: minsoldermaskwidth=0
PolygonConnect PolygonConnect_Via [All vs IsVia] p1: connectstyle=Direct reliefconductorwidth=10 reliefentries=4 polygonreliefangle="90 Angle" airgapwidth=10
PolygonConnect PolygonConnect_MCU [WithinRoom('MCU')] p2: connectstyle=Relief reliefconductorwidth=10 reliefentries=4 polygonreliefangle="90 Angle" airgapwidth=6
PolygonConnect [All] p3: connectstyle=Relief reliefconductorwidth=10 reliefentries=4 polygonreliefangle="90 Angle" airgapwidth=10
RoomDefinition "Audio I/V2" [InComponentClass('Audio I/V2')] p1: confinementstyle=ConfineIn formatcopy=TRUE lockcomponents=FALSE outline 805.72,32.83 1133.72,32.83 1133.72,580.83 805.72,580.83
RoomDefinition U_EMMC [InComponentClass('U_EMMC')] p2: confinementstyle=ConfineIn formatcopy=TRUE lockcomponents=FALSE outline 137.72,1140.83 702.72,1140.83 702.72,1705.83 137.72,1705.83
RoomDefinition MCU [InComponentClass('MCU')] p3: confinementstyle=ConfineIn formatcopy=TRUE lockcomponents=FALSE outline 738.71,915 2230.71,915 2230.71,1820 738.71,1820
RoomDefinition "HMI-Rotary Encoder2" [InComponentClass('HMI-Rotary Encoder2')] p4: confinementstyle=ConfineIn formatcopy=TRUE lockcomponents=FALSE outline 2406.72,180.83 3136.72,180.83 3136.72,782.83 2406.72,782.83
RoomDefinition "HMI-Rotary Encoder1" [InComponentClass('HMI-Rotary Encoder1')] p5: confinementstyle=ConfineIn formatcopy=TRUE lockcomponents=FALSE outline 2387.72,1530.83 3142.72,1530.83 3142.72,2135.83 2387.72,2135.83
RoomDefinition "Audio I/V1" [InComponentClass('Audio I/V1')] p6: confinementstyle=ConfineIn formatcopy=TRUE lockcomponents=FALSE outline 45,30 375,30 375,585 45,585
RoutingVias [All] p1: holewidth=8 width=16 viastyle="Through Hole" minholewidth=0 minwidth=0 maxholewidth=28 maxwidth=50
SilkToSolderMaskClearance [IsPad] p1: minsilkscreentomaskgap=0 clearancetoexposedcopper=TRUE
SolderMaskExpansion [All] p1: expansion=4 istentingtop=FALSE
SupplyNets "Schematic Supply Nets_13" [InNet('Audio_RT1')] p1: voltage=0.000
SupplyNets "Schematic Supply Nets_11" [InNet('DCDC_VEE_Audio')] p2: voltage=0.000
SupplyNets "Schematic Supply Nets_10" [InNet('DCDC_VCC_Audio')] p3: voltage=0.000
SupplyNets "Schematic Supply Nets_9" [InNet('VCC_Audio I/V1')] p4: voltage=0.000
SupplyNets "Schematic Supply Nets_1" [InNet('VEE_Audio I/V1')] p5: voltage=0.000
SupplyNets "Schematic Supply Nets_7" [InNet('VLDO4_3.3V')] p6: voltage=0.000
SupplyNets "Schematic Supply Nets_4" [InNet('VLDO1_1.8V')] p7: voltage=0.000
SupplyNets "Schematic Supply Nets_2" [InNet('VLDO3_1.8V')] p8: voltage=0.000
SupplyNets "Schematic Supply Nets_25" [InNet('VLDO2_3.3V')] p9: voltage=0.000
SupplyNets "Schematic Supply Nets_24" [InNet('VSYS')] p10: voltage=0.000
SupplyNets "Schematic Supply Nets_20" [InNet('VDCDC1')] p11: voltage=0.000
SupplyNets "Schematic Supply Nets_17" [InNet('VDCDC2')] p12: voltage=0.000
SupplyNets "Schematic Supply Nets_12" [InNet('VBUS')] p13: voltage=0.000
SupplyNets "Schematic Supply Nets_8" [InNet('-5')] p14: voltage=0.000
SupplyNets "Schematic Supply Nets_6" [InNet('VDDCAPDSI')] p15: voltage=0.000
SupplyNets "Schematic Supply Nets_5" [InNet('+5')] p16: voltage=0.000
SupplyNets "Schematic Supply Nets_3" [InNet('VBATT')] p17: voltage=0.000
SupplyNets "Schematic Supply Nets" [InNet('VCAP')] p18: voltage=0.000
UnRoutedNet [All] p1: checkbadconnections=TRUE
Width [All] p1: maxlimit=3937.01 minlimit=3.5 preferedwidth=6
21 further rules are at their usual default settings.

## Classes and differential pairs
net class QSPI: PF6 PF7 PF8 PF9 PF10
component class "U_Nor Flash": R1 U1
channel class Audio-HiFi: "Audio I/V1" "Audio I/V2"
component class "Audio I/V2": "C20_Audio I/V2" "C40_Audio I/V2" "C53_Audio I/V2" "C72_Audio I/V2" "C73_Audio I/V2" "C74_Audio I/V2" "C75_Audio I/V2" "C76_Audio I/V2" "C77_Audio I/V2" "C78_Audio I/V2" "C83_Audio I/V2" "C84_Audio I/V2" "R17_Audio I/V2" "R19_Audio I/V2" "R20_Audio I/V2" "R24_Audio I/V2" "R25_Audio I/V2" "R27_Audio I/V2" "R34_Audio I/V2" "R36_Audio I/V2" "R37_Audio I/V2" "R55_Audio I/V2" "R56_Audio I/V2" "R57_Audio I/V2" "R60_Audio I/V2" "R61_Audio I/V2" "R63_Audio I/V2" "R65_Audio I/V2" "U2_Audio I/V2" "U15_Audio I/V2" "U16_Audio I/V2"
component class "Audio I/V1": "C20_Audio I/V1" "C40_Audio I/V1" "C53_Audio I/V1" "C72_Audio I/V1" "C73_Audio I/V1" "C74_Audio I/V1" "C75_Audio I/V1" "C76_Audio I/V1" "C77_Audio I/V1" "C78_Audio I/V1" "C83_Audio I/V1" "C84_Audio I/V1" "R17_Audio I/V1" "R19_Audio I/V1" "R20_Audio I/V1" "R24_Audio I/V1" "R25_Audio I/V1" "R27_Audio I/V1" "R34_Audio I/V1" "R36_Audio I/V1" "R37_Audio I/V1" "R55_Audio I/V1" "R56_Audio I/V1" "R57_Audio I/V1" "R60_Audio I/V1" "R61_Audio I/V1" "R63_Audio I/V1" "R65_Audio I/V1" "U2_Audio I/V1" "U15_Audio I/V1" "U16_Audio I/V1"
differential pair class ADC: ADC-Ch1 ADC-Ch2
net class ADC: ADC-Ch1_N ADC-Ch1_P ADC-Ch2_N ADC-Ch2_P
differential pair class USB: Debug_USB USB USB-DBG
differential pair class MIPI: DSI_CK DSI_D0 DSI_D1
component class "Analog Front End": C27 C28 C29 C30 C31 C32 C33 C34 C35 C36 C37 C38 C39 C55 C59 C60 C61 C62 C63 J1 K1 K2 L6 L7 R26 R28 R29 R30 R31 R32 R38 R39 R40 R41 R42 R43 R44 R45 R48 R50 R51 R52 R53 R58 R59 R62 R64 U4 U5 U6 U7 U9 U10 U11
channel class "Rotary Encoder": "HMI-Rotary Encoder1" "HMI-Rotary Encoder2"
component class "HMI-Rotary Encoder2": "C1_HMI-Rotary Encoder2" "C2_HMI-Rotary Encoder2" "C3_HMI-Rotary Encoder2" "Encode_HMI-Rotary Encoder2" "R12_HMI-Rotary Encoder2" "R13_HMI-Rotary Encoder2" "R15_HMI-Rotary Encoder2"
component class "HMI-Rotary Encoder1": "C1_HMI-Rotary Encoder1" "C2_HMI-Rotary Encoder1" "C3_HMI-Rotary Encoder1" "Encode_HMI-Rotary Encoder1" "R12_HMI-Rotary Encoder1" "R13_HMI-Rotary Encoder1" "R15_HMI-Rotary Encoder1"
net class PK[0..7]: PK0 PK1 PK2 PK3 PK4 PK5 PK6 PK7
net class PJ[0..15]: PJ0 PJ1 PJ2 PJ3 PJ4 PJ5 PJ6 PJ7 PJ8 PJ9 PJ10 PJ11 PJ12 PJ13 PJ14 PJ15
net class PI[0..15]: FMC_D24 FMC_D25 FMC_D26 FMC_D27 FMC_D28 FMC_D29 FMC_D30 FMC_D31 FMC_NBL2 FMC_NBL3 PI8 PI11 PI12 PI13 PI14 PI15
net class PH[0..15]: FMC_D16 FMC_D17 FMC_D18 FMC_D19 FMC_D20 FMC_D21 FMC_D22 FMC_D23 PH0 PH1 PH2 PH3 PH4 PH5 PH6 PH7
net class PG[0..15]: FMC_A10 FMC_A11 FMC_A12 FMC_A13 FMC_A14 FMC_A15 PG6 PG7 PG8 PG9 PG10 PG11 PG12 PG13 PG14 PG15
net class PF[0..15]: FMC_A0 FMC_A1 FMC_A2 FMC_A3 FMC_A4 FMC_A5 FMC_A6 FMC_A7 FMC_A8 FMC_A9 PF6 PF7 PF8 PF9 PF10 PF11
net class PE[0..15]: FMC_D4 FMC_D5 FMC_D6 FMC_D7 FMC_D8 FMC_D9 FMC_D10 FMC_D11 FMC_D12 FMC_NBL0 FMC_NBL1 PE2 PE3 PE4 PE5 PE6
net class PD[0..15]: FMC_D0 FMC_D1 FMC_D2 FMC_D3 FMC_D13 FMC_D14 FMC_D15 PD2 PD3 PD4 PD5 PD6 PD7 PD11 PD12 PD13
net class PC[0..15]: PC0 PC1 PC2 PC3 PC4 PC5 PC6 PC7 PC8 PC9 PC10 PC11 PC12 PC13 PC14 PC15
net class PB[0..15]: PB0 PB1 PB2 PB3 PB4 PB5 PB6 PB7 PB8 PB9 PB10 PB11 PB12 PB13 PB14 PB15
net class PA[0..15]: PA0 PA1 PA2 PA3 PA4 PA5 PA6 PA7 PA8 PA9 PA10 PA11 PA12 PA13 PA14 PA15
net class SDRAM2: FMC_A0 FMC_A1 FMC_A2 FMC_A3 FMC_A4 FMC_A5 FMC_A6 FMC_A7 FMC_A8 FMC_A9 FMC_A10 FMC_A11 FMC_A12 FMC_A13 FMC_A14 FMC_A15 FMC_D0 FMC_D1 FMC_D2 FMC_D3 FMC_D4 FMC_D5 FMC_D6 FMC_D7 FMC_D8 FMC_D9 FMC_D10 FMC_D11 FMC_D12 FMC_D13 FMC_D14 FMC_D15 FMC_D16 FMC_D17 FMC_D18 FMC_D19 FMC_D20 FMC_D21 FMC_D22 FMC_D23 FMC_D24 FMC_D25 FMC_D26 FMC_D27 FMC_D28 FMC_D29 FMC_D30 FMC_D31 FMC_NBL0 FMC_NBL1 FMC_NBL2 FMC_NBL3 PF11 PG8 PG15 PH5 PH6 PH7
net class MIPI: DSI_CK_N DSI_CK_P DSI_D0_N DSI_D0_P DSI_D1_N DSI_D1_P
net class SDMMC: PB8 PB9 PC6 PC7 PC8 PC9 PC10 PC11 PC12 PD2
component class Designator: ANT1 Audio B1 B2 "Battery Connector" C1 C2 C3 C4 C5 C6 C7 C8 C9 C15 C16 C17 C18 C19 C21 C22 C23 C24 C25 C56 C58 C64 C66 C67 C68 C69 C70 C71 C79 C80 C81 C82 C86 C92 C93 C94 D2 FPC1 FPC2 L1 L2 L3 L4 L5 L8 LED1 LED2 MR1 MR2 MR3 MR4 R2 R3 R4 R8 R9 R10 R11 R12 R13 R14 R15 R16 R18 R21 R22 R23 R33 R35 R46 R47 R49 R54 SPK+ SPK- SW1 TP2 TP3 TP4 TP5 TP6 TP7 U3 U8 U12 U18 U19 U21 U26 USBC1 USBC2 X3 X4
net class SDRAM1: FMC_A0 FMC_A1 FMC_A2 FMC_A3 FMC_A4 FMC_A5 FMC_A6 FMC_A7 FMC_A8 FMC_A9 FMC_A10 FMC_A11 FMC_A12 FMC_A13 FMC_A14 FMC_A15 FMC_D0 FMC_D1 FMC_D2 FMC_D3 FMC_D4 FMC_D5 FMC_D6 FMC_D7 FMC_D8 FMC_D9 FMC_D10 FMC_D11 FMC_D12 FMC_D13 FMC_D14 FMC_D15 FMC_D16 FMC_D17 FMC_D18 FMC_D19 FMC_D20 FMC_D21 FMC_D22 FMC_D23 FMC_D24 FMC_D25 FMC_D26 FMC_D27 FMC_D28 FMC_D29 FMC_D30 FMC_D31 FMC_NBL0 FMC_NBL1 FMC_NBL2 FMC_NBL3 PC2 PC3 PF11 PG8 PG15 PH5
channel class SDRAM: U_SDRAM1 U_SDRAM2
net class FMC_NBL[0..3]: FMC_NBL0 FMC_NBL1 FMC_NBL2 FMC_NBL3
net class FMC_D[0..31]: FMC_D0 FMC_D1 FMC_D2 FMC_D3 FMC_D4 FMC_D5 FMC_D6 FMC_D7 FMC_D8 FMC_D9 FMC_D10 FMC_D11 FMC_D12 FMC_D13 FMC_D14 FMC_D15 FMC_D16 FMC_D17 FMC_D18 FMC_D19 FMC_D20 FMC_D21 FMC_D22 FMC_D23 FMC_D24 FMC_D25 FMC_D26 FMC_D27 FMC_D28 FMC_D29 FMC_D30 FMC_D31
net class FMC_A[0..15]: FMC_A0 FMC_A1 FMC_A2 FMC_A3 FMC_A4 FMC_A5 FMC_A6 FMC_A7 FMC_A8 FMC_A9 FMC_A10 FMC_A11 FMC_A12 FMC_A13 FMC_A14 FMC_A15
component class U_SDRAM2: C16_U_SDRAM2 C17_U_SDRAM2 C18_U_SDRAM2 C19_U_SDRAM2 C20_U_SDRAM2 C21_U_SDRAM2 C22_U_SDRAM2 C23_U_SDRAM2 C24_U_SDRAM2 C25_U_SDRAM2 C26_U_SDRAM2 C27_U_SDRAM2 U10_U_SDRAM2
component class U_SDRAM1: C16_U_SDRAM1 C17_U_SDRAM1 C18_U_SDRAM1 C19_U_SDRAM1 C20_U_SDRAM1 C21_U_SDRAM1 C22_U_SDRAM1 C23_U_SDRAM1 C24_U_SDRAM1 C25_U_SDRAM1 C26_U_SDRAM1 C27_U_SDRAM1 U10_U_SDRAM1
net class SDMMC_D[0..7]: PB8 PB9 PC6 PC7 PC8 PC9 PC10 PC11
component class U_EMMC: C95 U15 U16 U22
component class MCU: C10 C11 C12 C13 C14 C26 C41 C42 C43 C44 C45 C46 C47 C48 C49 C50 C51 C52 C54 C57 C65 R5 R6 R7 U13 X2
differential pair Audio_DAC2: +Audio_DAC1_P -Audio_DAC1_N
differential pair Audio_DAC1: +Audio_DAC2_P -Audio_DAC2_N
differential pair ADC-Ch2: +ADC-Ch2_P -ADC-Ch2_N
differential pair USB-DBG: +USB-DBG_P -USB-DBG_N
differential pair ADC-Ch1: +ADC-Ch1_P -ADC-Ch1_N
differential pair DSI_D1: +DSI_D1_P -DSI_D1_N
differential pair DSI_D0: +DSI_D0_P -DSI_D0_N
differential pair DSI_CK: +DSI_CK_P -DSI_CK_N

## Components (designator, comment, footprint, x,y, rotation, side; value= is the part's Value field where it differs from the comment)
ANT1 "PCB ANT" WIFI-ANT 2645,3452.01 r90 top
Audio "PJ342" PJ342A 585,-67.76 r180 top
B1 "BLM15AG601SN1D" L0603 615,560 r0 top
B2 "BLM15AG601SN1D" L0603 616.5,802.87 r0 top
"Battery Connector" "BM25-4S" BM25-4S/2-V-51 2864.06,2335.35 r180 top
C1 "10uF" 0603-C 2862.4,1157.01 r0 top value=0.1u
"C1_HMI-Rotary Encoder1" "100nF" 0402-C 2438.58,1969.49 r180 top value=0.1u (schematic designator C1)
"C1_HMI-Rotary Encoder2" "100nF" 0402-C 2453.64,597.8 r180 top value=0.1u (schematic designator C1)
C2 "10uF" 0603-C 2545,917.01 r270 top value=0.1u
"C2_HMI-Rotary Encoder1" "100nF" 0402-C 2438.58,1654.53 r180 top value=0.1u (schematic designator C2)
"C2_HMI-Rotary Encoder2" "100nF" 0402-C 2453.45,414.26 r180 top value=0.1u (schematic designator C2)
C3 "10uF" 0603-C 2862.4,1112.01 r0 top value=0.1u
"C3_HMI-Rotary Encoder1" "100nF" 0402-C 2438.58,1870.08 r180 top value=0.1u (schematic designator C3)
"C3_HMI-Rotary Encoder2" "100nF" 0402-C 2453.45,510.14 r180 top value=0.1u (schematic designator C3)
C4 "10uF" 0603-C 2867.4,982.01 r180 top value=0.1u
C5 "10uF" 0603-C 2862.4,1287.01 r180 top value=0.1u
C6 "10uF" 0603-C 2815,1387.01 r270 top value=0.1u
C7 "10uF" 0603-C 2680,1382.01 r90 top value=0.1u
C8 "10uF" 0603-C 2430,1044.01 r180 top value=0.1u
C9 "0.1uF" 0603-C 2430,999.01 r180 top value=0.1u
C10 "2.2uF" 0402-C 1195,1769.58 r270 top value=0.1u
C11 "0.1uF" 0402-C 1233.25,1770.08 r270 top value=0.1u
C12 "4.7uF" 0402-C 895.51,1770.08 r270 top value=0.1u
C13 "4.7uF" 0402-C 1400.76,1578.23 r180 top value=0.1u
C14 "4.7uF" 0402-C 859,1770 r270 top value=0.1u
C15 "10uF" 0603-C 2430,1232.01 r180 top value=0.1u
C16 "10uF" 0603-C 2590,917.01 r90 top value=0.1u
C16_U_SDRAM1 "100nF" 0402-C 1729.41,1719.59 r90 top value=0.1u (schematic designator C16)
C16_U_SDRAM2 "100nF" 0402-C 2284.59,1191.15 r0 top value=0.1u (schematic designator C16)
C17 "10uF" 0603-C 2430,954.01 r0 top value=0.1u
C17_U_SDRAM1 "100nF" 0402-C 2284.59,1549.44 r0 top value=0.1u (schematic designator C17)
C17_U_SDRAM2 "100nF" 0402-C 2284.59,1242.33 r0 top value=0.1u (schematic designator C17)
C18 "10uF" 0603-C 2430,1187.01 r0 top value=0.1u
C18_U_SDRAM1 "100nF" 0402-C 2284.59,1600.63 r0 top value=0.1u (schematic designator C18)
C18_U_SDRAM2 "100nF" 0402-C 1870.82,1719.59 r90 top value=0.1u (schematic designator C18)
C19 "1uF" 0402-C 310,1052.01 r90 top value=0.1u
C19_U_SDRAM1 "100nF" 0402-C 1399.82,1615.08 r180 top value=0.1u (schematic designator C19)
C19_U_SDRAM2 "100nF" 0402-C 2284.59,1651.81 r0 top value=0.1u (schematic designator C19)
"C20_Audio I/V1" "360p" 0402-C 92.28,321.18 r0 top value=0.1u (schematic designator C20)
"C20_Audio I/V2" "360p" 0402-C 852.28,321.18 r0 top value=0.1u (schematic designator C20)
C20_U_SDRAM1 "100nF" 0402-C 1682.27,1719.59 r90 top value=0.1u (schematic designator C20)
C20_U_SDRAM2 "100nF" 0402-C 2284.59,1139.96 r0 top value=0.1u (schematic designator C20)
C21 "10uF" 0402-C 600,1847.01 r180 top value=0.1u
C21_U_SDRAM1 "100nF" 0402-C 1409,1243 r180 top value=0.1u (schematic designator C21)
C21_U_SDRAM2 "100nF" 0402-C 1917.96,1719.59 r90 top value=0.1u (schematic designator C21)
C22 "0.1uF" 0402-C 600,1812.01 r180 top value=0.1u
C22_U_SDRAM1 "100nF" 0402-C 1588,1719.59 r90 top value=0.1u (schematic designator C22)
C22_U_SDRAM2 "100nF" 0402-C 1823.69,1719.59 r90 top value=0.1u (schematic designator C22)
C23 "10uF" 0603-C 2430,1097.01 r0 top value=0.1u
C23_U_SDRAM1 "100nF" 0402-C 1409,1164 r180 top value=0.1u (schematic designator C23)
C23_U_SDRAM2 "100nF" 0402-C 1776.55,1719.59 r90 top value=0.1u (schematic designator C23)
C24 "10pF" 0402-C 2820,3327.01 r90 top value=0.1u
C24_U_SDRAM1 "100nF" 0402-C 2284.59,1703 r0 top value=0.1u (schematic designator C24)
C24_U_SDRAM2 "100nF" 0402-C 2284.59,1344.7 r0 top value=0.1u (schematic designator C24)
C25 "10p" 0402-C 110,2107.01 r0 top value=0.1u
C25_U_SDRAM1 "100nF" 0402-C 1635.14,1719.59 r90 top value=0.1u (schematic designator C25)
C25_U_SDRAM2 "100nF" 0402-C 2284.59,1447.07 r0 top value=0.1u (schematic designator C25)
C26 "1uF" 0402-C 1244.55,1056.58 r90 top value=0.1u
C26_U_SDRAM1 "100nF" 0402-C 2284.59,1498.26 r0 top value=0.1u (schematic designator C26)
C26_U_SDRAM2 "100nF" 0402-C 2284.59,1395.89 r0 top value=0.1u (schematic designator C26)
C27 "1uF" 0402-C 1530,850 r180 top value=0.1u
C27_U_SDRAM1 "100nF" 0402-C 1400.12,1660.89 r180 top value=0.1u (schematic designator C27)
C27_U_SDRAM2 "100nF" 0402-C 2284.59,1293.52 r0 top value=0.1u (schematic designator C27)
C28 "0.1uF" 0402-C 1555.2,665.59 r180 top value=0.1u
C29 "0.1uF" 0402-C 1720.2,665.59 r180 top value=0.1u
C30 "0.1uF" 0402-C 1955,475 r270 top value=0.1u
C31 "0.1uF" 0402-C 1955,400 r90 top value=0.1u
C32 "3pF" 0402-C 1525,435 r270 top
C33 "0.1uF" 0402-C 2415,705 r270 top value=0.1u
C34 "1uF" 0402-C 2045,630 r90 top value=0.1u
C35 "0.1uF" 0402-C 1975,630 r90 top value=0.1u
C36 "1uF" 0402-C 2080,630 r90 top value=0.1u
C37 "10uF" 0402-C 959.96,830.59 r270 top value=0.1u
C38 "0.1uF" 0402-C 929.96,830.59 r270 top value=0.1u
C39 "10uF" 0402-C 989.96,830.59 r270 top value=0.1u
"C40_Audio I/V1" "10u" 0402-C 329,441 r0 top value=0.1u (schematic designator C40)
"C40_Audio I/V2" "10u" 0402-C 1087.28,442 r0 top value=0.1u (schematic designator C40)
C41 "100nF" 0402-C 1269.45,1770.83 r90 top value=0.1u
C42 "100nF" 0402-C 972,1771.22 r90 top value=0.1u
C43 "100nF" 0402-C 813.1,1768.03 r90 top value=0.1u
C44 "100nF" 0402-C 940,1770.22 r90 top value=0.1u
C45 "100nF" 0402-C 773,1769 r90 top value=0.1u
C46 "100nF" 0402-C 1301.45,1770.83 r90 top value=0.1u
C47 "100nF" 0402-C 840.22,1065.6 r270 top value=0.1u
C48 "100nF" 0402-C 809.22,1065.6 r270 top value=0.1u
C49 "100nF" 0402-C 1589,1061.78 r270 top value=0.1u
C50 "100nF" 0402-C 1557,1061.78 r270 top value=0.1u
C51 "100nF" 0402-C 1683,1061.78 r270 top value=0.1u
C52 "100nF" 0402-C 1652,1061.78 r270 top value=0.1u
"C53_Audio I/V1" "1u" 0402-C 329,489 r0 top value=0.1u (schematic designator C53)
"C53_Audio I/V2" "1u" 0402-C 1087.28,490 r0 top value=0.1u (schematic designator C53)
C54 "3.9p" 0402-C 1010.29,1089.83 r180 top value=0.1u
C55 "10uF" 0402-C 1019.96,830.59 r270 top value=0.1u
C56 "1uF" 0402-C 1915,2080 r270 top value=0.1u
C57 "3.9p" 0402-C 1085.29,1088.83 r0 top value=0.1u
C58 "0.1uF" 0402-C 1915,2155 r90 top value=0.1u
C59 "0.1uF" 0402-C 2010,630 r90 top value=0.1u
C60 "56pF" 0402-C 1525,515 r270 top
C61 "0.1uF" 0402-C 1605,850 r180 top value=0.1u
C62 "0.1uF" 0402-C 1755,850 r180 top value=0.1u
C63 "0.1uF" 0402-C 1955,550 r270 top value=0.1u
C64 "1uF" 0402-C 2635,2625 r90 top value=0.1u
C65 "100nF" 0402-C 1179.67,1057.29 r270 top value=0.1u
C66 "12p" 0402-C 2600,2625 r270 top value=0.1u
C67 "12p" 0402-C 2565,2625 r270 top value=0.1u
C68 "10uF" 0603-C 2430,1142.01 r0 top value=0.1u
C69 "10uF/50V" 0603-C 2430,1277.01 r0 top value=0.1u
C70 "10p" 0402-C 110,1837.01 r0 top value=0.1u
C71 "0.1uF" 0402-C 110,1802.01 r180 top value=0.1u
"C72_Audio I/V1" "0.1u" 0402-C 329,537 r0 top (schematic designator C72)
"C72_Audio I/V2" "0.1u" 0402-C 1087.28,538 r0 top (schematic designator C72)
"C73_Audio I/V1" "10u" 0402-C 91,442 r0 top value=0.1u (schematic designator C73)
"C73_Audio I/V2" "10u" 0402-C 852.28,492.04 r0 top value=0.1u (schematic designator C73)
"C74_Audio I/V1" "360p" 0402-C 237.28,381.18 r270 top value=0.1u (schematic designator C74)
"C74_Audio I/V2" "360p" 0402-C 997.28,381.18 r270 top value=0.1u (schematic designator C74)
"C75_Audio I/V1" "360p" 0402-C 331.28,321.18 r0 top value=0.1u (schematic designator C75)
"C75_Audio I/V2" "360p" 0402-C 1091.49,321.04 r0 top value=0.1u (schematic designator C75)
"C76_Audio I/V1" "820p" 0402-C 92.28,131.18 r0 top value=0.1u (schematic designator C76)
"C76_Audio I/V2" "820p" 0402-C 852.28,131.18 r0 top value=0.1u (schematic designator C76)
"C77_Audio I/V1" "1800p" 0402-C 331.28,96.18 r180 top value=0.1u (schematic designator C77)
"C77_Audio I/V2" "1800p" 0402-C 1091.49,96.04 r180 top value=0.1u (schematic designator C77)
"C78_Audio I/V1" "820p" 0402-C 331.28,131.18 r180 top value=0.1u (schematic designator C78)
"C78_Audio I/V2" "820p" 0402-C 1091.49,131.04 r180 top value=0.1u (schematic designator C78)
C79 "10uF" 0402-C 455.44,730.25 r270 top value=0.1u
C80 "0.1uF" 0402-C 455.56,640.28 r90 top value=0.1u
C81 "10uF" 0402-C 775,730 r90 top value=0.1u
C82 "10uF" 0402-C 775,640 r270 top value=0.1u
"C83_Audio I/V1" "1u" 0402-C 91,490 r0 top value=0.1u (schematic designator C83)
"C83_Audio I/V2" "1u" 0402-C 852.75,445 r0 top value=0.1u (schematic designator C83)
"C84_Audio I/V1" "0.1u" 0402-C 91,538 r0 top (schematic designator C84)
"C84_Audio I/V2" "0.1u" 0402-C 852.22,543.84 r0 top (schematic designator C84)
C86 "NFM18PS105D0J3D" FP-NFM18-0_1-e0_05_0_35-MFG 731.5,560 r180 top
C92 "NFM18PS105D0J3D" FP-NFM18-0_1-e0_05_0_35-MFG 498.5,560 r180 top
C93 "NFM18PS105D0J3D" FP-NFM18-0_1-e0_05_0_35-MFG 732.99,802.87 r180 top
C94 "NFM18PS105D0J3D" FP-NFM18-0_1-e0_05_0_35-MFG 500,802.87 r180 top
C95 "1uF" 0402-C 170,1542.01 r270 top value=0.1u
D2 "B5819WS-TP" FP-SOD-323-IPC_C 2430,1382.01 r90 top
"Encode_HMI-Rotary Encoder1" "SIQ-02FVS3" SW-SMD_SIQ-02FVS3_1 2742.36,1833.36 r270 top (schematic designator Encode)
"Encode_HMI-Rotary Encoder2" "SIQ-02FVS3" SW-SMD_SIQ-02FVS3_1 2740,482.01 r270 top (schematic designator Encode)
FPC1 "OK-06F024-04" OK-06F024-04 859.35,2090.86 r0 top
FPC2 "AFC01-S06FCA-00" FPC-SMD_P0.50-6P_AFC01-S06FCA-00 1285,2037.01 r180 top
J1 "MCX-KE" 60612202111308 1320.11,130 r0 top
K1 "AQW212SX" FP-AQW212SX-MFG 1321.89,605 r0 top
K2 "AQY212GSZ" FP-AQY212GSZ-MFG 1325,905 r0 top
L1 "2.2uH" L0805 2859.8,1047.01 r0 top
L2 "2.2uH" L0805 2862.4,1222.01 r0 top
L3 "2.2uH" L0805 2750,1387.01 r90 top
L4 "4.7uH" L0805 510,685 r90 top
L5 "18uH" L0805 2515,1384.41 r90 top
L6 "4.7uH" L0805 870,717.01 r90 top
L7 "4.7uH" L0805 1080,717.01 r270 top
L8 "4.7uH" L0805 720,685 r270 top
LED1 "红色" LED0603_B 66,1185 r0 top
LED2 "红色" LED0603_B 66,1126 r0 top
MR1 "MARK1.6" "Mark 1" 620,2185 r90 top
MR2 "MARK1.6" "Mark 1" 71.91,655.48 r90 top
MR3 "MARK1.6" "Mark 1" 2865,870 r90 top
MR4 "MARK1.6" "Mark 1" 2514,2404 r90 top
R1 "47K" 0402-R 385,1045 r90 top
R2 "10K" 0402-R 2710,917.01 r270 top
R3 "10K" 0603-R 2665,917.01 r270 top
R4 "10k" 0402-R 110,2142.01 r0 top
R5 "10K" 0402-R 909.85,1065.65 r90 top
R6 "10K" 0402-R 1208.8,1057.35 r270 top
R7 "10K" 0402-R 872.22,1065.6 r90 top
R8 "10k" 0402-R 110,1767.01 r0 top
R9 "10K" 0402-R 169,1126 r180 top
R10 "10K" 0402-R 169,1185 r180 top
R11 "5.1k" 0402-R 2025,150 r270 top
R12 "65K" 0402-R 2630,1382.01 r270 top
"R12_HMI-Rotary Encoder1" "4.7k" 0402-R 2438.58,2000.98 r180 top (schematic designator R12)
"R12_HMI-Rotary Encoder2" "4.7k" 0402-R 2454.08,632.98 r180 top (schematic designator R12)
R13 "65K" 0402-R 2580,1382.01 r270 top
"R13_HMI-Rotary Encoder1" "4.7k" 0402-R 2438.58,1686.02 r180 top (schematic designator R13)
"R13_HMI-Rotary Encoder2" "4.7k" 0402-R 2453.64,450 r180 top (schematic designator R13)
R14 "5.1k" 0402-R 2060,150 r270 top
R15 "5.1k" 0402-R 2060,75 r90 top
"R15_HMI-Rotary Encoder1" "4.7k" 0402-R 2438.58,1901.57 r180 top (schematic designator R15)
"R15_HMI-Rotary Encoder2" "4.7k" 0402-R 2453.64,544.25 r180 top (schematic designator R15)
R16 "5.1k" 0402-R 2025,75 r90 top
"R17_Audio I/V1" "1.8k" 0402-R 92.28,281.18 r180 top (schematic designator R17)
"R17_Audio I/V2" "1.8k" 0402-R 852.28,281.18 r180 top (schematic designator R17)
R18 "47k" 0402-R 2705,2625 r270 top
"R19_Audio I/V1" "4.3" 0402-R 272.28,381.18 r90 top (schematic designator R19)
"R19_Audio I/V2" "4.3" 0402-R 1032.28,381.18 r90 top (schematic designator R19)
"R20_Audio I/V1" "3.2k" 0402-R 92.28,241.18 r0 top (schematic designator R20)
"R20_Audio I/V2" "3.2k" 0402-R 852.28,241.18 r0 top (schematic designator R20)
R21 "47k" 0402-R 2670,2625 r270 top
R22 "47k" 0402-R 2810,2625 r270 top
R23 "47k" 0402-R 2775,2625 r270 top
"R24_Audio I/V1" "10k" 0402-R 202.28,381.18 r90 top (schematic designator R24)
"R24_Audio I/V2" "10k" 0402-R 962.28,381.18 r90 top (schematic designator R24)
"R25_Audio I/V1" "10k" 0402-R 132.28,381.18 r90 top (schematic designator R25)
"R25_Audio I/V2" "10k" 0402-R 892.28,381.18 r90 top (schematic designator R25)
R26 "1K" 0402-R 1842.01,790 r270 top
"R27_Audio I/V1" "10k" 0402-R 167.28,381.18 r270 top (schematic designator R27)
"R27_Audio I/V2" "10k" 0402-R 927.28,381.18 r270 top (schematic designator R27)
R28 "1K" 0402-R 1635.2,665.59 r180 top
R29 "1K" 0402-R 1675,515 r180 top
R30 "1K" 0402-R 1675,550 r180 top
R31 "1K" 0402-R 1675,585 r180 top
R32 "1K" 0402-R 1675,620 r180 top
R33 "47k" 0402-R 2740,2625 r270 top
"R34_Audio I/V1" "3.2k" 0402-R 331.28,241.18 r0 top (schematic designator R34)
"R34_Audio I/V2" "3.2k" 0402-R 1091.49,241.04 r0 top (schematic designator R34)
R35 "10k" 0402-R 2880,2625 r270 top
"R36_Audio I/V1" "4.3" 0402-R 307.28,381.18 r90 top (schematic designator R36)
"R36_Audio I/V2" "4.3" 0402-R 1067.28,381.18 r90 top (schematic designator R36)
"R37_Audio I/V1" "1.8k" 0402-R 331.28,281.18 r180 top (schematic designator R37)
"R37_Audio I/V2" "1.8k" 0402-R 1091.49,281.04 r180 top (schematic designator R37)
R38 "1K" 0402-R 2182.01,450 r270 top
R39 "830k" 0402-R 1580,415 r180 top
R40 "1K" 0402-R 1675,480 r180 top
R41 "1K" 0402-R 2150,450 r270 top
R42 "1K" 0402-R 1675,445 r180 top
R43 "1K" 0402-R 1675,410 r180 top
R44 "1K" 0402-R 1675,375 r180 top
R45 "1K" 0402-R 1680,850 r180 top
R46 "10k" 0402-R 2915,2625 r270 top
R47 "10k" 0402-R 2845,2625 r270 top
R48 "500" 0402-R 2080,800 r270 top
R49 "10k" 0402-R 2900,3325 r270 top
R50 "1K" 0402-R 1812.01,790 r90 top
R51 "1K" 0402-R 1812.01,715 r270 top
R52 "1K" 0402-R 1842.01,715 r90 top
R53 "500" 0402-R 2080,725 r90 top
R54 "10k" 0402-R 2950,2625 r270 top
"R55_Audio I/V1" "1.6k" 0402-R 92.28,201.18 r0 top (schematic designator R55)
"R55_Audio I/V2" "1.6k" 0402-R 852.28,201.18 r0 top (schematic designator R55)
"R56_Audio I/V1" "348" 0402-R 92.28,166.18 r180 top (schematic designator R56)
"R56_Audio I/V2" "348" 0402-R 852.28,166.18 r180 top (schematic designator R56)
"R57_Audio I/V1" "10" 0402-R 92.28,61.18 r180 top (schematic designator R57)
"R57_Audio I/V2" "10" 0402-R 852.28,61.18 r180 top (schematic designator R57)
R58 "130k" 0402-R 1580,455 r0 top
R59 "1K" 0402-R 2215,450 r270 top
"R60_Audio I/V1" "249" 0402-R 331.28,61.18 r180 top (schematic designator R60)
"R60_Audio I/V2" "249" 0402-R 1091.49,61.04 r180 top (schematic designator R60)
"R61_Audio I/V1" "10" 0402-R 92.28,96.18 r0 top (schematic designator R61)
"R61_Audio I/V2" "10" 0402-R 852.28,96.18 r0 top (schematic designator R61)
R62 "20k" 0402-R 1580,495 r180 top
"R63_Audio I/V1" "1.6k" 0402-R 331.28,201.18 r180 top (schematic designator R63)
"R63_Audio I/V2" "1.6k" 0402-R 1091.49,201.04 r180 top (schematic designator R63)
R64 "30k" 0402-R 1580,535 r0 top
"R65_Audio I/V1" "348" 0402-R 331.28,166.18 r0 top (schematic designator R65)
"R65_Audio I/V2" "348" 0402-R 1091.49,166.04 r0 top (schematic designator R65)
SPK+ "" SMD_L2.2-W1.0_KH-221020-TP 2508.58,3841.06 r90 top
SPK- "" SMD_L2.2-W1.0_KH-221020-TP 2427.32,3841.06 r90 top
SW1 "TD-1187SA-250" SW-SMD-3.5*3.0_4P 55.43,1340 r90 top
TP2 "" "TEST 1" 525,1745 r90 top
TP3 "" "TEST 1" 425,1745 r90 top
TP4 "" "TEST 1" 325,1745 r90 top
TP5 "" SMD_L2.2-W1.0_KH-221020-TP 105,2220 r90 top
TP6 "" SMD_L2.2-W1.0_KH-221020-TP 205,2220 r90 top
TP7 "" "TEST 1" 305,2235 r90 top
U1 "MT25QL256ABA1EW9-0SIT" WSON8 596.38,980 r0 top
"U2_Audio I/V1" "AD8066ARZ-R7" DFN-8_L3.0-W3.0-P0.50-BL-EP 212.28,271.18 r270 top (schematic designator U2)
"U2_Audio I/V2" "AD8066ARZ-R7" DFN-8_L3.0-W3.0-P0.50-BL-EP 972.28,271.18 r270 top (schematic designator U2)
U3 "ES9039Q2M" "QFN32 5x5_L" 241.09,897.51 r90 top
U4 "ADA4940-1ACPZ-RL" ADI-CP-16-2_M 1967.01,760 r0 top
U5 "LMH6559MF/NOPB" DBV0005A_L 1560.2,760.59 r180 top
U6 "TPS65133DPDR" FP-DPD0012A-MFG 975,717.01 r90 top
U7 "LMH6624MF/NOPB" DBV0005A_L 1715.2,760.59 r180 top
U8 "ICM-42688-P" LGA-14_L3.0-W2.5-P0.50-TL 1825,2120 r90 top
U9 "TLV3501AIDBVT" FP-DBV0006A-MFG 2050,475 r270 top
U10 "74HC595PW-Q100,118" FP-SOT403-1-MFG 2290,670 r90 top
U10_U_SDRAM1 "IS42S32800G-6BLI" BGA-90_L13.0-W8.0-R6-C15-P0.80-TL 1625.78,1388.66 r0 top locked (schematic designator U10)
U10_U_SDRAM2 "IS42S32800G-6BLI" BGA-90_L13.0-W8.0-R6-C15-P0.80-TL 2044.96,1391.49 r0 top locked (schematic designator U10)
U11 "ADG1408YRUZ" ADI-RU-16_N 1825,498.9 r270 top
U12 "AP6212" QFN-44_L12.0-W12.0-P0.90-TL 2678,2996.58 r270 top
U13 "STM32H747XIH6" FP-TFBGA240+25-A07U-MFG 1053.94,1420.16 r90 top locked
"U15_Audio I/V1" "LMH6624MF/NOPB" DBV0005A_L 212,491 r0 top (schematic designator U15)
"U15_Audio I/V2" "LMH6624MF/NOPB" DBV0005A_L 972,491 r0 top (schematic designator U15)
"U16_Audio I/V1" "AD8066ARZ-R7" DFN-8_L3.0-W3.0-P0.50-BL-EP 212.28,126.18 r270 top (schematic designator U16)
"U16_Audio I/V2" "AD8066ARZ-R7" DFN-8_L3.0-W3.0-P0.50-BL-EP 972.28,126.18 r270 top (schematic designator U16)
U18 "STM32G431CBT6" FP-LQFP48-5B-MFG 400,2002.01 r0 top
U19 "TPS65133DPDR" FP-DPD0012A-MFG 615,685 r90 top
U21 "TPS65217DRSLR" FP-RSL0048A-MFG 2629.88,1144.88 r90 top
U22 "KLM8G1GETF-B041006" FBGA-153_L13.0-W11.5-P0.50_KLMAG1JETD-B041 453.59,1417.48 r0 top
U26 "MAX98357AETE+T" FP-T1633-4-MFG 2468.9,3637.17 r90 top
USBC1 "USB Type C -16P" USB-C-SMD_16P 2291.93,198 r180 top
USBC2 "USB Type C -16P" USB-C-SMD_16P 1790,198 r180 top
X2 "25M" XTAL-3225-4P 1042.29,1004.83 r0 top
X3 "8M" XTAL-3215-2P 110,1972.01 r90 top
X4 "26M" XTAL-3225-4P 2465,2612.01 r270 top

## Footprints (in the part's own frame and the unit in brackets; to place one, negate y for a bottom-side part, rotate by r counter-clockwise, add the part's x,y. Pads: shape width x height; smd on the part's side, far side on the other; paste and mask are expansions set on the pad)
0402-C [mil]
  rrect50% 20x20 smd: 1(-20,0) 2(20,0)
  silkscreen extent -7,-9 7,9, body extent -20,-10 20,10, height 20
0402-R [mil]
  rrect50% 20x20 smd: 1(-20,0) 2(20,0)
  silkscreen extent -7,-10 7,10, body extent -20,-10 20,10, height 14
0603-C [mil]
  rrect50% 22x30 smd: 1(-30,0) 2(30,0)
  silkscreen extent -10,-15 10,15, body extent -31,-16 32,16, height 31
0603-R [mil] "1/10W贴片电阻"
  rect 30x30 smd: 1(-25.59,0) 2(25.59,0)
  body extent -31,-16 31,16, height 16
60612202111308 [mm] "MCX PCB End Launch Jack"
  rect 1.1x3.3 smd: 1(0,4.8)
  rect 0.5x6.3 smd paste+0: 2(-3,0) 3(3,0)
  Top Layer region: -3.55,-3.15 -2.45,-3.15 -2.45,2.9 -2.546,2.919 -2.627,2.973 -2.681,3.054 -2.7,3.15 -2.7,3.15 -3.55,3.15
  Top Layer region: 3.55,-3.15 2.45,-3.15 2.45,2.9 2.546,2.919 2.627,2.973 2.681,3.054 2.7,3.15 2.7,3.15 3.55,3.15
  Keep-Out Layer board cut-out: -2.45,-3.15 2.45,-3.15 2.45,2.9 2.563,2.927 2.652,3.003 2.697,3.111 2.688,3.227 2.627,3.327 2.527,3.388 2.411,3.397 2.303,3.352 2.227,3.263 2.2,3.15 2.2,3.15 -2.2,3.15 -2.227,3.263 -2.303,3.352 -2.411,3.397 -2.527,3.388 -2.627,3.327 -2.688,3.227 -2.697,3.111 -2.652,3.003 -2.563,2.927 -2.45,2.9 -2.45,2.9
  body extent -3.35,-3.15 3.35,6.15, height 2.98
ADI-CP-16-2_M [mm] "QFN, 16-Leads, Body 3x3mm, Pitch 0.5mm, Thermal Pad 1.3x1.3mm, IPC Low Density"
  oval 0.8x0.2 smd: 1(-1.55,0.75) 2(-1.55,0.25) 3(-1.55,-0.25) 4(-1.55,-0.75) 9(1.55,-0.75) 10(1.55,-0.25) 11(1.55,0.25) 12(1.55,0.75)
  oval 0.2x0.8 smd: 5(-0.75,-1.55) 6(-0.25,-1.55) 7(0.25,-1.55) 8(0.75,-1.55) 13(0.75,1.55) 14(0.25,1.55) 15(-0.25,1.55) 16(-0.75,1.55)
  rect 1.3x1.3 smd: 17(0,0)
  silkscreen extent -2.42,-1.65 1.65,1.65, body extent -1.5,-1.5 1.5,1.5, height 1
ADI-RU-16_N [mm] "SOP, 16-Leads, Body 5x4.4mm, Pitch 0.65mm, IPC Medium Density"
  oval 1.55x0.35 smd: 1(-2.875,2.275) 2(-2.875,1.625) 3(-2.875,0.975) 4(-2.875,0.325) 5(-2.875,-0.325) 6(-2.875,-0.975) 7(-2.875,-1.625) 8(-2.875,-2.275) 9(2.875,-2.275) 10(2.875,-1.625) 11(2.875,-0.975) 12(2.875,-0.325) 13(2.875,0.325) 14(2.875,0.975) 15(2.875,1.625) 16(2.875,2.275)
  silkscreen extent -3,-2.55 1.7,3.13, body extent -2.25,-2.55 2.25,2.55, height 1.2
BGA-90_L13.0-W8.0-R6-C15-P0.80-TL [mm]
  round 0.45 smd: A1(-3.2,5.6) A2(-2.4,5.6) A3(-1.6,5.6) A7(1.6,5.6) A8(2.4,5.6) A9(3.2,5.6) B1(-3.2,4.8) B2(-2.4,4.8) B3(-1.6,4.8) B7(1.6,4.8) B8(2.4,4.8) B9(3.2,4.8) C1(-3.2,4) C2(-2.4,4) C3(-1.6,4) C7(1.6,4) C8(2.4,4) C9(3.2,4) D1(-3.2,3.2) D2(-2.4,3.2) D3(-1.6,3.2) D7(1.6,3.2) D8(2.4,3.2) D9(3.2,3.2) E1(-3.2,2.4) E2(-2.4,2.4) E3(-1.6,2.4) E7(1.6,2.4) E8(2.4,2.4) E9(3.2,2.4) F1(-3.2,1.6) F2(-2.4,1.6) F3(-1.6,1.6) F7(1.6,1.6) F8(2.4,1.6) F9(3.2,1.6) G1(-3.2,0.8) G2(-2.4,0.8) G3(-1.6,0.8) G7(1.6,0.8) G8(2.4,0.8) G9(3.2,0.8) H1(-3.2,0) H2(-2.4,0) H3(-1.6,0) H7(1.6,0) H8(2.4,0) H9(3.2,0) J1(-3.2,-0.8) J2(-2.4,-0.8) J3(-1.6,-0.8) J7(1.6,-0.8) J8(2.4,-0.8) J9(3.2,-0.8) K1(-3.2,-1.6) K2(-2.4,-1.6) K3(-1.6,-1.6) K7(1.6,-1.6) K8(2.4,-1.6) K9(3.2,-1.6) L1(-3.2,-2.4) L2(-2.4,-2.4) L3(-1.6,-2.4) L7(1.6,-2.4) L8(2.4,-2.4) L9(3.2,-2.4) M1(-3.2,-3.2) M2(-2.4,-3.2) M3(-1.6,-3.2) M7(1.6,-3.2) M8(2.4,-3.2) M9(3.2,-3.2) N1(-3.2,-4) N2(-2.4,-4) N3(-1.6,-4) N7(1.6,-4) N8(2.4,-4) N9(3.2,-4) P1(-3.2,-4.8) P2(-2.4,-4.8) P3(-1.6,-4.8) P7(1.6,-4.8) P8(2.4,-4.8) P9(3.2,-4.8) R1(-3.2,-5.6) R2(-2.4,-5.6) R3(-1.6,-5.6) R7(1.6,-5.6) R8(2.4,-5.6) R9(3.2,-5.6)
  silkscreen extent -4.74,-6.5 4,6.56, body extent -4,-6.5 4,6.5, height 0.9
BM25-4S/2-V-51 [mm] "Battery Connector"
  rect 0.7x0.6 smd: 1(-0.833,-1.185) 2(-0.833,1.185) 7(0.818,-1.185) 8(0.818,1.185)
  rect 0.25x0.6 smd: 3(-0.175,-1.185) 4(-0.175,1.185) 5(0.206,-1.185) 6(0.206,1.185)
  rect 1.25x0.6 smd: 9(-1.881,-1.185) 10(-1.881,1.185) 11(1.881,-1.185) 12(1.881,1.185)
  rect 0.35x0.65 smd: 13(-2.331,-0.423) 14(-2.331,0.395) 15(2.331,-0.399) 16(2.331,0.395)
  body extent -2.5,-1.3 2.5,1.3, height 0.7
DBV0005A_L [mm] "SOT23, 5-Leads, Body 3.05x1.75mm, Pitch 0.95mm, IPC High Density"
  rrect18% 0.8x0.55 smd: 1(-1.275,0.95) 2(-1.275,0) 3(-1.275,-0.95) 4(1.275,-0.95) 5(1.275,0.95)
  silkscreen extent -1.4,-1.55 0.5,1.9, body extent -1.42,-1.46 1.42,1.46, height 1.08
DFN-8_L3.0-W3.0-P0.50-BL-EP [mm]
  rect 0.28x0.665 smd paste+0.051: 1(-0.75,-1.407) 2(-0.25,-1.407) 3(0.25,-1.407) 4(0.75,-1.407) 5(0.75,1.407) 6(0.25,1.407) 7(-0.25,1.407) 8(-0.75,1.407)
  rect 2.45x1.65 smd paste+0.051: 9(0,0)
  silkscreen extent -1.58,-1.93 1.58,1.58, body extent -1.5,-1.51 1.5,1.51, height 1.02
FBGA-153_L13.0-W11.5-P0.50_KLMAG1JETD-B041 [mm]
  round 0.25 smd paste-100 mask+0.05: A1(-3.25,3.25) A2(-2.75,3.25) A3(-2.25,3.25) A4(-1.75,3.25) A5(-1.25,3.25) A6(-0.75,3.25) A7(-0.25,3.25) A8(0.25,3.25) A9(0.75,3.25) A10(1.25,3.25) A11(1.75,3.25) A12(2.25,3.25) A13(2.75,3.25) A14(3.25,3.25) B1(-3.25,2.75) B2(-2.75,2.75) B3(-2.25,2.75) B4(-1.75,2.75) B5(-1.25,2.75) B6(-0.75,2.75) B7(-0.25,2.75) B8(0.25,2.75) B9(0.75,2.75) B10(1.25,2.75) B11(1.75,2.75) B12(2.25,2.75) B13(2.75,2.75) B14(3.25,2.75) C1(-3.25,2.25) C2(-2.75,2.25) C3(-2.25,2.25) C4(-1.75,2.25) C5(-1.25,2.25) C6(-0.75,2.25) C7(-0.25,2.25) C8(0.25,2.25) C9(0.75,2.25) C10(1.25,2.25) C11(1.75,2.25) C12(2.25,2.25) C13(2.75,2.25) C14(3.25,2.25) D1(-3.25,1.75) D2(-2.75,1.75) D3(-2.25,1.75) D4(-1.75,1.75) D12(2.25,1.75) D13(2.75,1.75) D14(3.25,1.75) E1(-3.25,1.25) E2(-2.75,1.25) E3(-2.25,1.25) E5(-1.25,1.25) E6(-0.75,1.25) E7(-0.25,1.25) E8(0.25,1.25) E9(0.75,1.25) E10(1.25,1.25) E12(2.25,1.25) E13(2.75,1.25) E14(3.25,1.25) F1(-3.25,0.75) F2(-2.75,0.75) F3(-2.25,0.75) F5(-1.25,0.75) F10(1.25,0.75) F12(2.25,0.75) F13(2.75,0.75) F14(3.25,0.75) G1(-3.25,0.25) G2(-2.75,0.25) G3(-2.25,0.25) G5(-1.25,0.25) G10(1.25,0.25) G12(2.25,0.25) G13(2.75,0.25) G14(3.25,0.25) H1(-3.25,-0.25) H2(-2.75,-0.25) H3(-2.25,-0.25) H5(-1.25,-0.25) H10(1.25,-0.25) H12(2.25,-0.25) H13(2.75,-0.25) H14(3.25,-0.25) J1(-3.25,-0.75) J2(-2.75,-0.75) J3(-2.25,-0.75) J5(-1.25,-0.75) J10(1.25,-0.75) J12(2.25,-0.75) J13(2.75,-0.75) J14(3.25,-0.75) K1(-3.25,-1.25) K2(-2.75,-1.25) K3(-2.25,-1.25) K5(-1.25,-1.25) K6(-0.75,-1.25) K7(-0.25,-1.25) K8(0.25,-1.25) K9(0.75,-1.25) K10(1.25,-1.25) K12(2.25,-1.25) K13(2.75,-1.25) K14(3.25,-1.25) L1(-3.25,-1.75) L2(-2.75,-1.75) L3(-2.25,-1.75) L12(2.25,-1.75) L13(2.75,-1.75) L14(3.25,-1.75) M1(-3.25,-2.25) M2(-2.75,-2.25) M3(-2.25,-2.25) M4(-1.75,-2.25) M5(-1.25,-2.25) M6(-0.75,-2.25) M7(-0.25,-2.25) M8(0.25,-2.25) M9(0.75,-2.25) M10(1.25,-2.25) M11(1.75,-2.25) M12(2.25,-2.25) M13(2.75,-2.25) M14(3.25,-2.25) N1(-3.25,-2.75) N2(-2.75,-2.75) N3(-2.25,-2.75) N4(-1.75,-2.75) N5(-1.25,-2.75) N6(-0.75,-2.75) N7(-0.25,-2.75) N8(0.25,-2.75) N9(0.75,-2.75) N10(1.25,-2.75) N11(1.75,-2.75) N12(2.25,-2.75) N13(2.75,-2.75) N14(3.25,-2.75) P1(-3.25,-3.25) P2(-2.75,-3.25) P3(-2.25,-3.25) P4(-1.75,-3.25) P5(-1.25,-3.25) P6(-0.75,-3.25) P7(-0.25,-3.25) P8(0.25,-3.25) P9(0.75,-3.25) P10(1.25,-3.25) P11(1.75,-3.25) P12(2.25,-3.25) P13(2.75,-3.25) P14(3.25,-3.25)
  silkscreen extent -6.22,-6.61 5.84,6.86, body extent -5.75,-6.5 5.75,6.5, height 0.89
FP-AQW212SX-MFG [mm]
  rect 1.2x0.8 smd paste+0 mask+0: 1(-3,3.81) 2(-3,1.27) 3(-3,-1.27) 4(-3,-3.81) 5(3,-3.81) 6(3,-1.27) 7(3,1.27) 8(3,3.81)
  silkscreen extent -4.27,-4.78 2,4.78, body extent -3.7,-4.88 3.7,4.88, height 0.25
FP-AQY212GSZ-MFG [mm]
  rect 1.2x0.8 smd paste+0 mask+0: 1(-3,1.27) 2(-3,-1.27) 3(3,-1.27) 4(3,1.27)
  silkscreen extent -4.27,-2.25 2.3,2.25, body extent -3.7,-2.35 3.7,2.35, height 0.25
FP-DBV0006A-MFG [mm]
  rrect17% 1.1x0.6 smd paste+0 mask+0: 1(-1.3,0.95) 2(-1.3,0) 3(-1.3,-0.95) 4(1.3,-0.95) 5(1.3,0) 6(1.3,0.95)
  silkscreen extent -2.52,-1.52 0.35,1.53, body extent -1.95,-1.78 1.95,1.77, height 0.25
FP-DPD0012A-MFG [mm]
  rrect100% 0.6x0.2 smd paste+0 mask+0: 1(-1.4,1.125) 2(-1.4,0.675) 3(-1.4,0.225) 4(-1.4,-0.225) 5(-1.4,-0.675) 6(-1.4,-1.125) 7(1.4,-1.125) 8(1.4,-0.675) 9(1.4,-0.225) 10(1.4,0.225) 11(1.4,0.675) 12(1.4,1.125)
  rect 1.21x2.02 smd paste-1000 mask+0: 13(0,0)
  silkscreen extent -2.4,-1.6 1.5,1.6, body extent -1.8,-1.65 1.8,1.65, height 0.25
FP-LQFP48-5B-MFG [mm]
  rect 1.2x0.3 smd paste+0 mask+0: 1(-4.25,2.75) 2(-4.25,2.25) 3(-4.25,1.75) 4(-4.25,1.25) 5(-4.25,0.75) 6(-4.25,0.25) 7(-4.25,-0.25) 8(-4.25,-0.75) 9(-4.25,-1.25) 10(-4.25,-1.75) 11(-4.25,-2.25) 12(-4.25,-2.75) 25(4.25,-2.75) 26(4.25,-2.25) 27(4.25,-1.75) 28(4.25,-1.25) 29(4.25,-0.75) 30(4.25,-0.25) 31(4.25,0.25) 32(4.25,0.75) 33(4.25,1.25) 34(4.25,1.75) 35(4.25,2.25) 36(4.25,2.75)
  rect 0.3x1.2 smd paste+0 mask+0: 13(-2.75,-4.25) 14(-2.25,-4.25) 15(-1.75,-4.25) 16(-1.25,-4.25) 17(-0.75,-4.25) 18(-0.25,-4.25) 19(0.25,-4.25) 20(0.75,-4.25) 21(1.25,-4.25) 22(1.75,-4.25) 23(2.25,-4.25) 24(2.75,-4.25) 37(2.75,4.25) 38(2.25,4.25) 39(1.75,4.25) 40(1.25,4.25) 41(0.75,4.25) 42(0.25,4.25) 43(-0.25,4.25) 44(-0.75,4.25) 45(-1.25,4.25) 46(-1.75,4.25) 47(-2.25,4.25) 48(-2.75,4.25)
  silkscreen extent -5.62,-3.6 3.6,3.6, body extent -4.95,-4.95 4.95,4.95, height 0.25
FP-NFM18-0_1-e0_05_0_35-MFG [mm]
  round 0.36 smd paste+0 mask+0: 1(-0.8,0) 2(0,0.4) 2(0,-0.4) 3(0.8,0)
  Top Layer region: -0.4,-0.6 0.4,-0.6 0.4,-0.25 0.35,-0.2 -0.35,-0.2 -0.4,-0.25 -0.4,-0.6
  Top Layer region: -0.4,0.6 0.4,0.6 0.4,0.25 0.35,0.2 -0.35,0.2 -0.4,0.25 -0.4,0.6
  Top Layer region: 1,-0.2 1,0.2 0.65,0.2 0.6,0.15 0.6,-0.15 0.65,-0.2 1,-0.2
  Top Layer region: -1,-0.2 -1,0.2 -0.65,0.2 -0.6,0.15 -0.6,-0.15 -0.65,-0.2 -1,-0.2
  silkscreen extent -1.68,-0.12 -1.43,0.12, body extent -1.1,-0.7 1.1,0.7, height 0.25